# EAGLE board SparkFun_Interactive_Badge_Panel_v10 (EAGLE 6.6.0), part 1 of 11
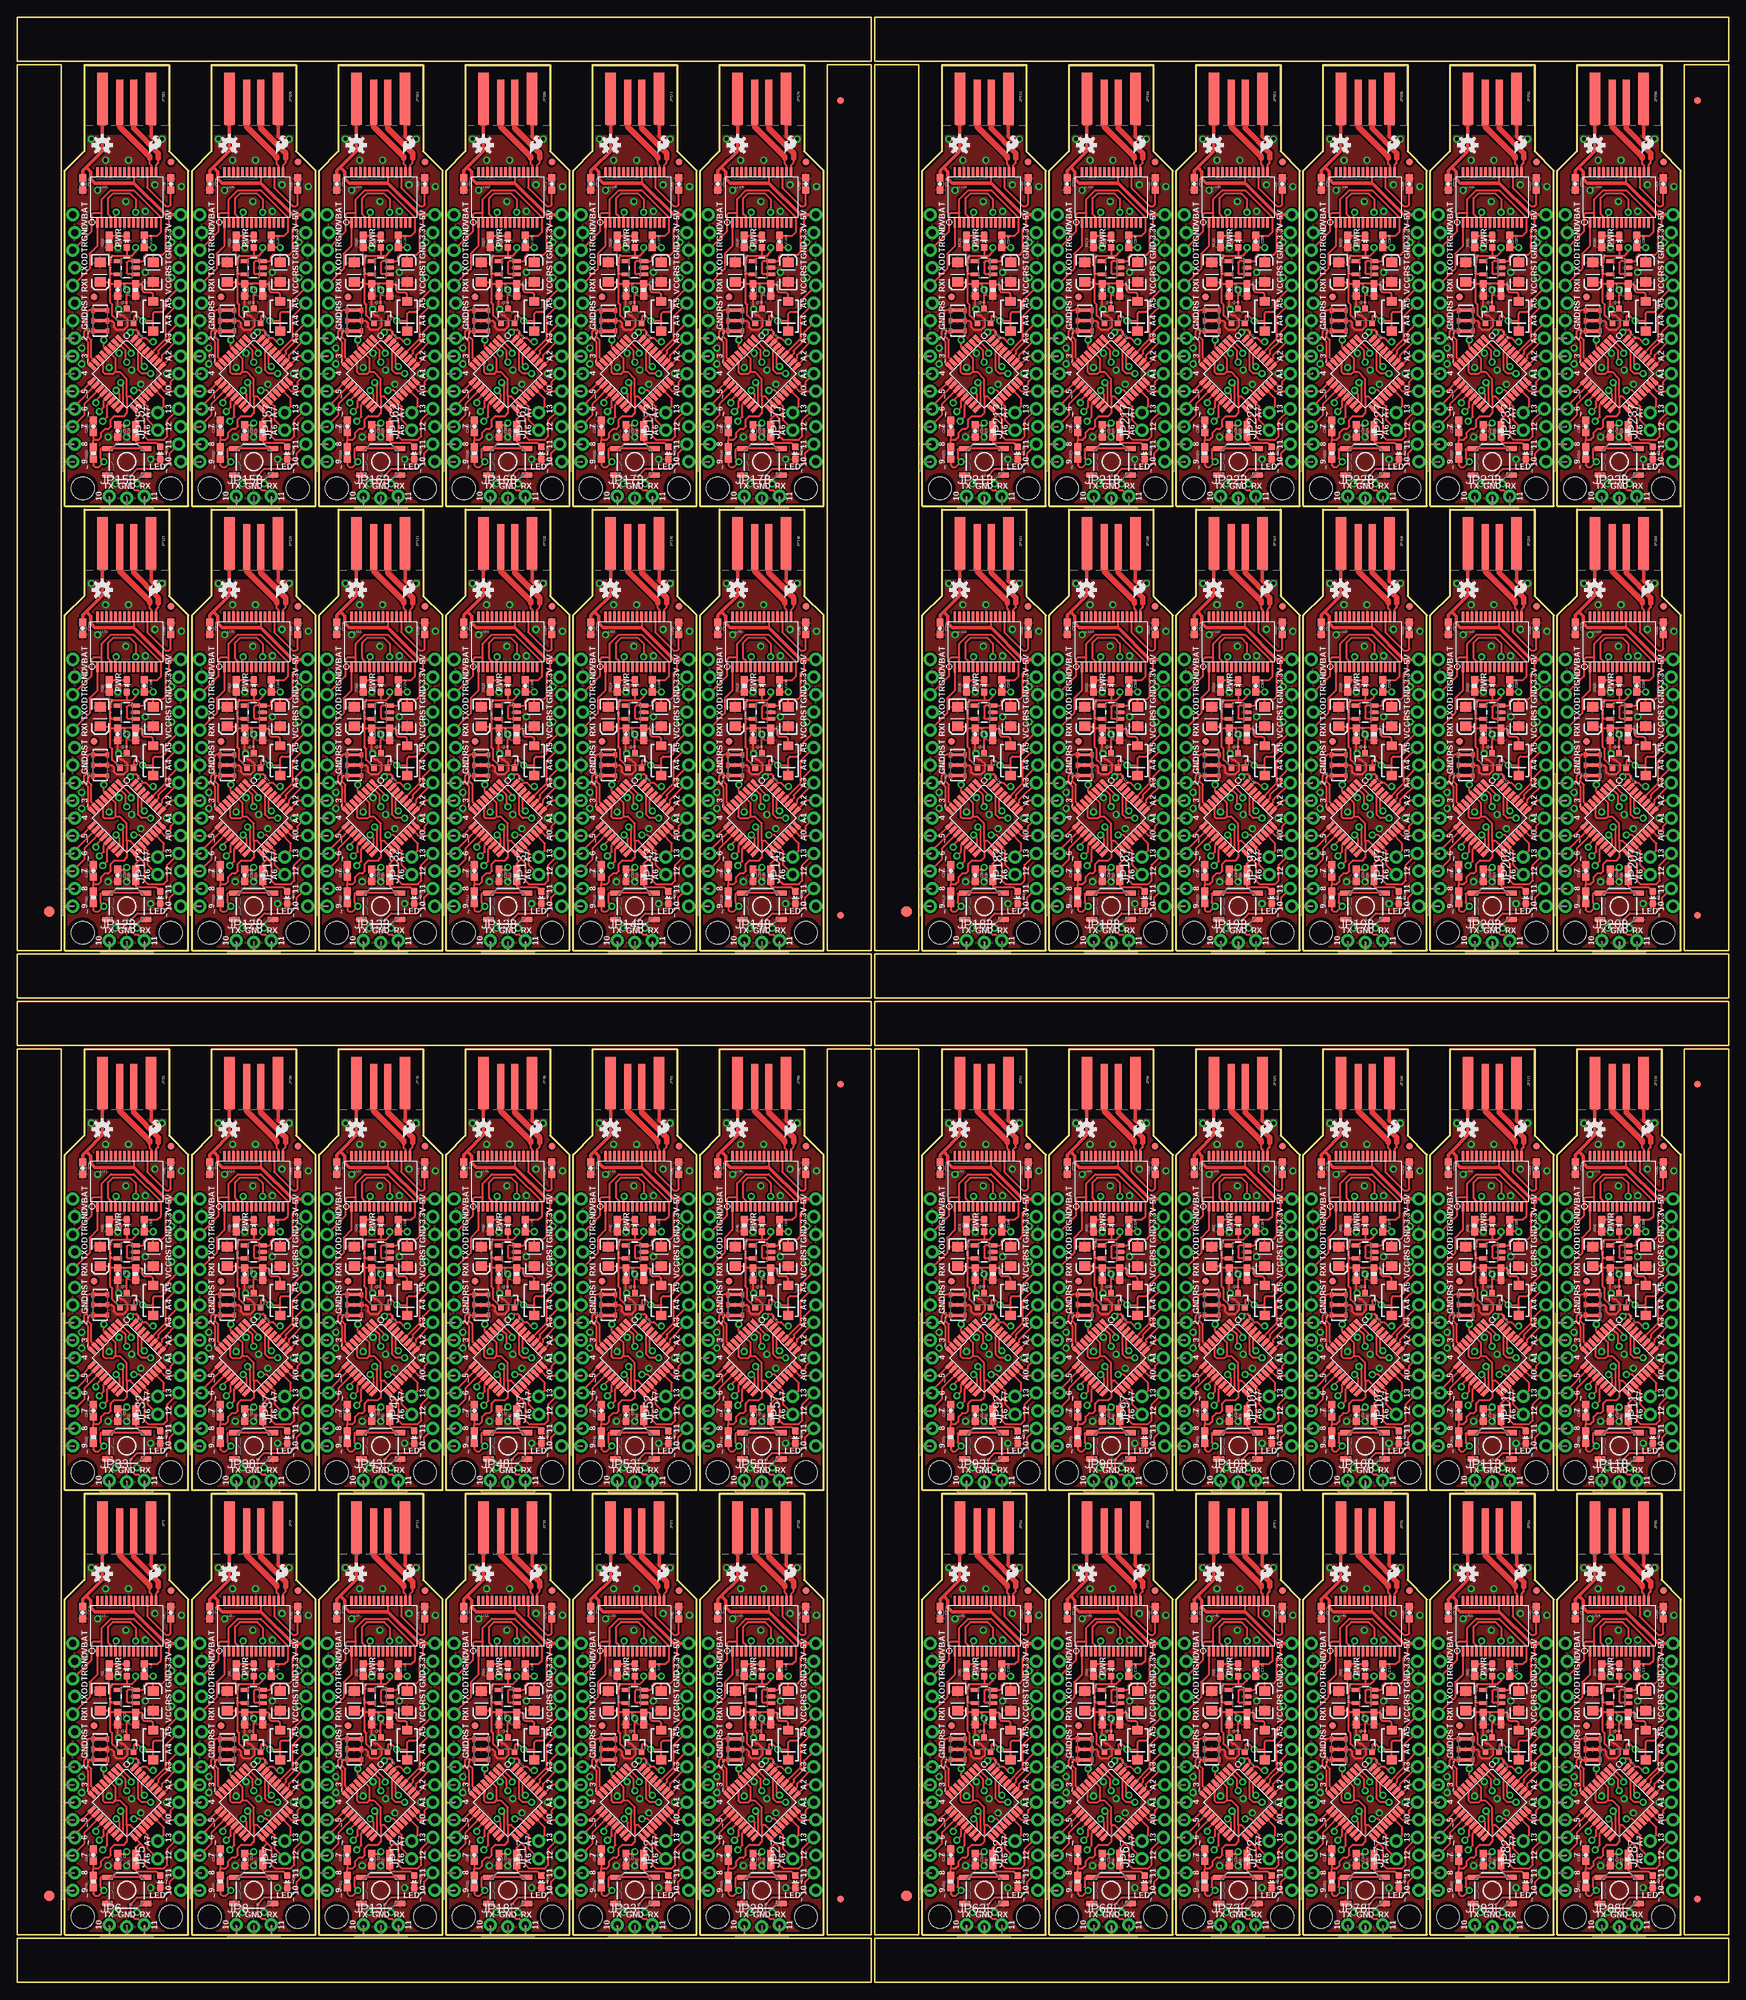
[diagram p0: board, top side]
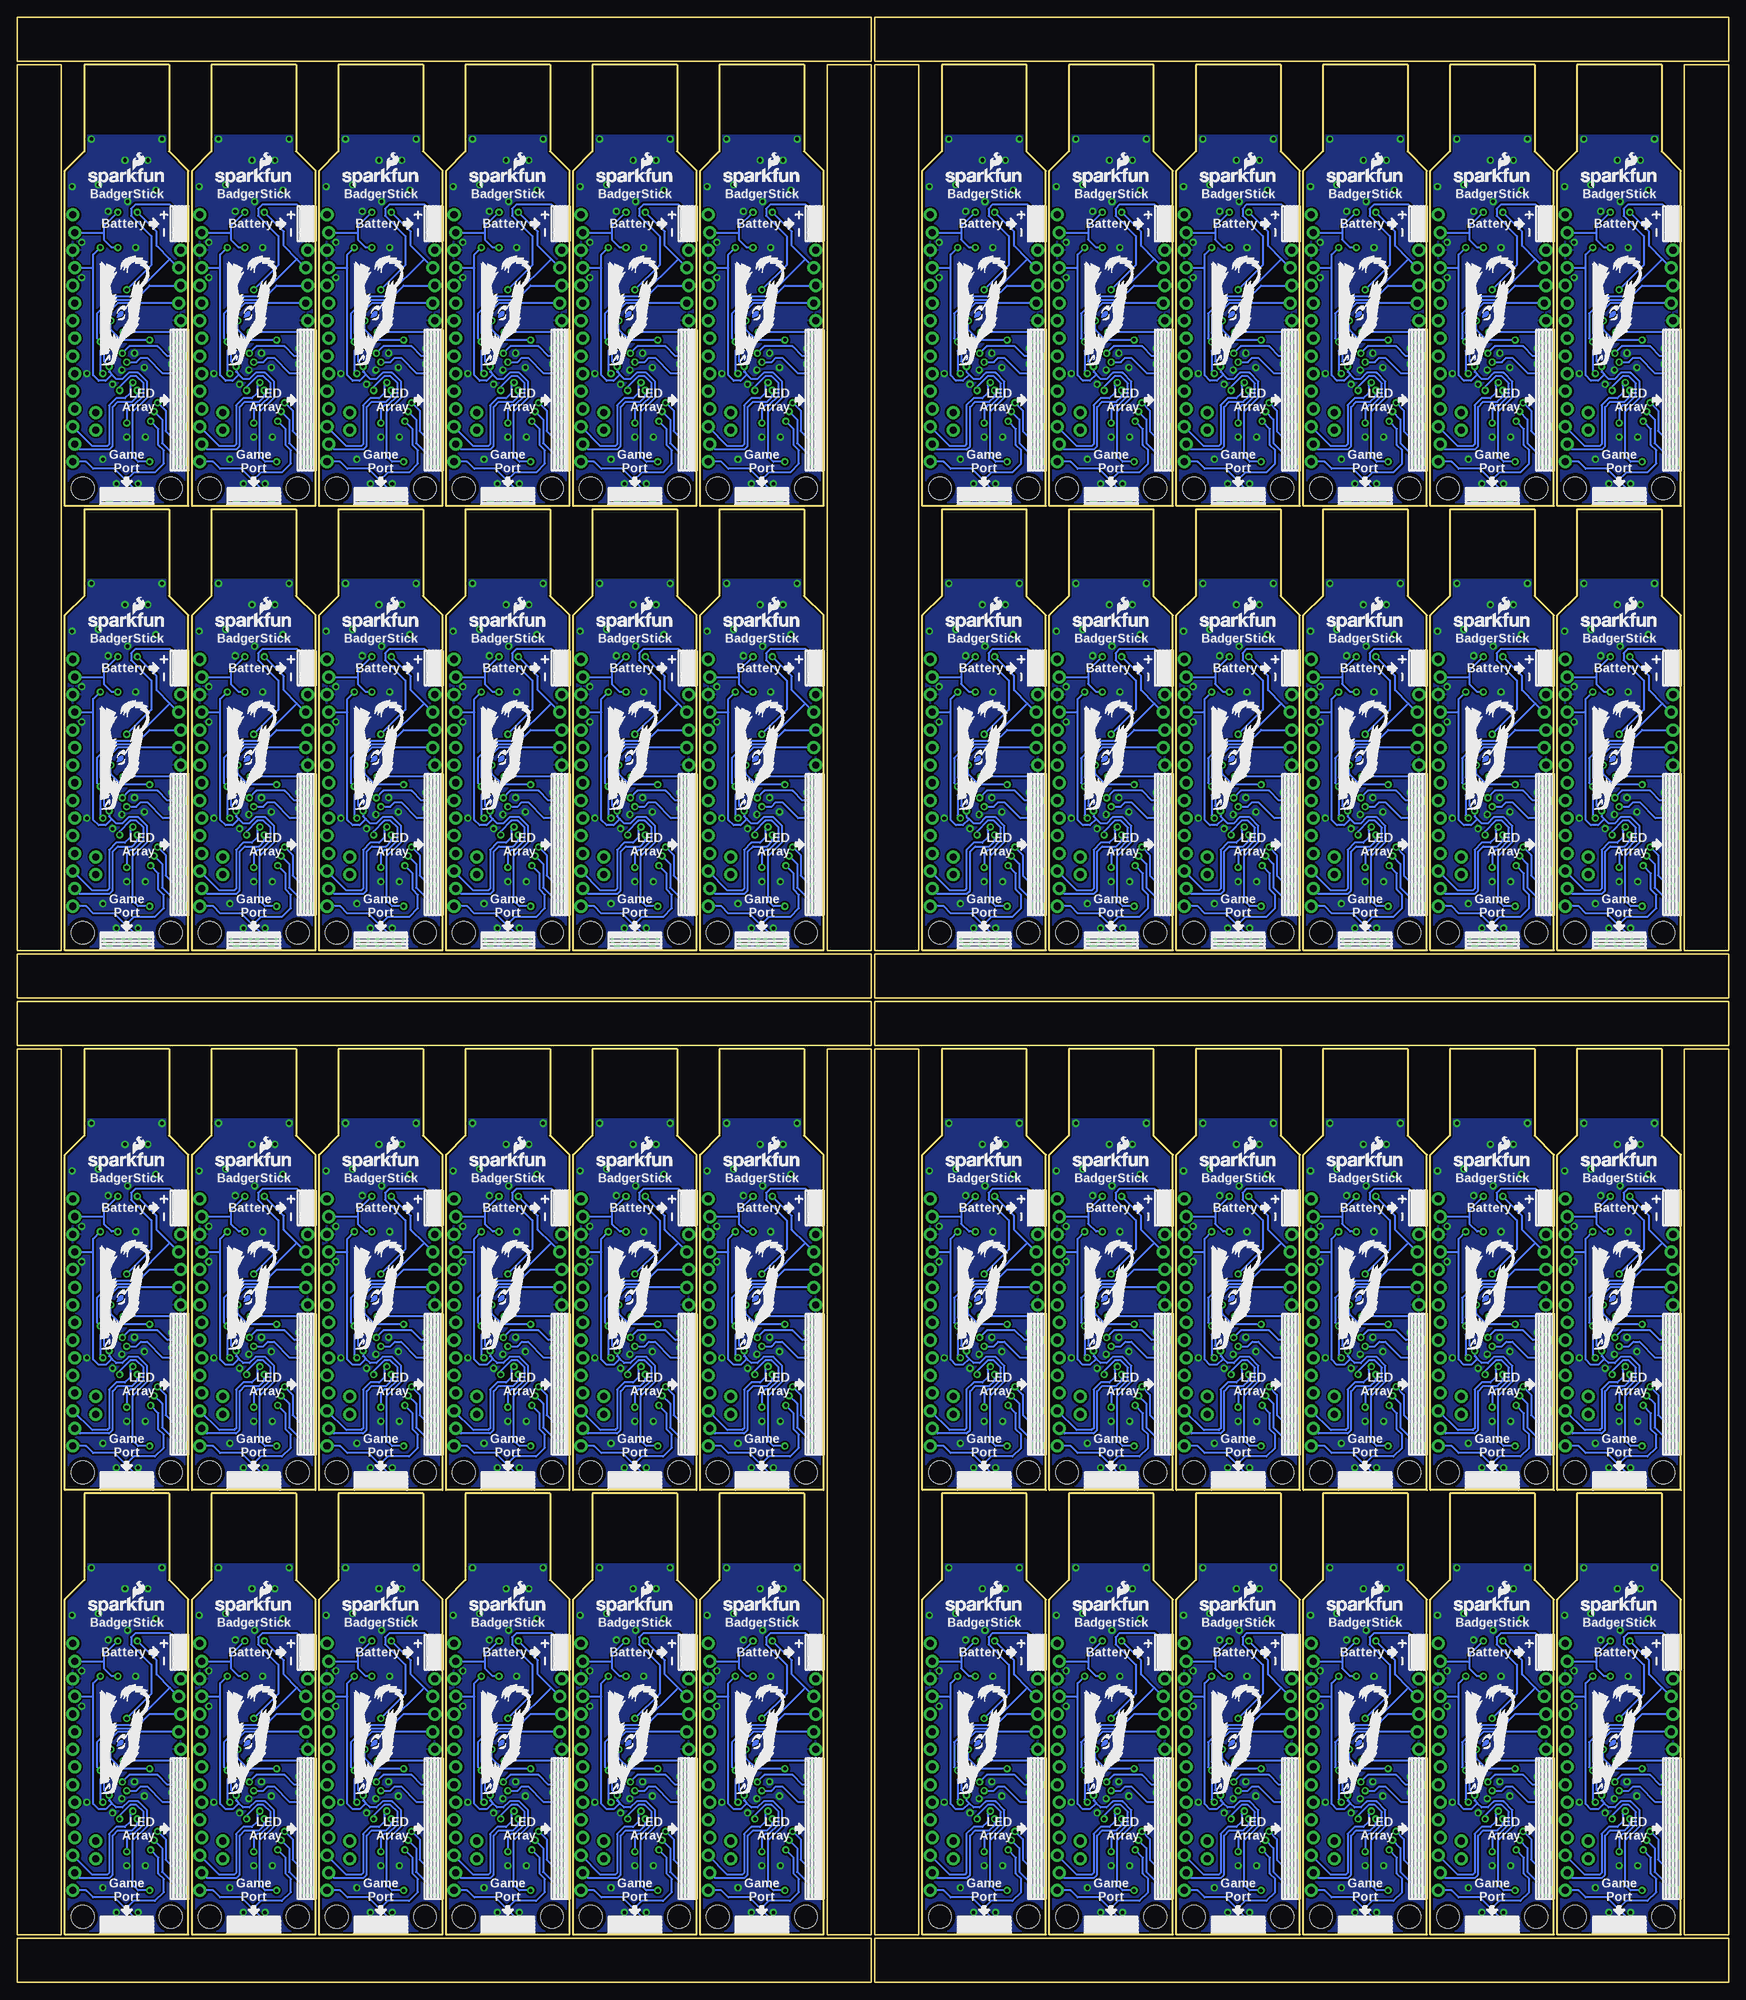
[diagram p1: board, bottom side, seen from below]

Size 246.38 x 282.96 mm. Coordinates in mm from the lower left corner, seen from the top.
Outline: 448 segments
Copper layers (1*16): Top 0.035mm / dielectric 1.5mm / Bottom 0.035mm
Design rules "SparkFun-2-layer": minimum track width 7mil, minimum drill 15mil, track to track 8mil, track to pad 8mil, pad to pad 8mil, via to via 8mil, smd to smd 8mil, copper to edge 8mil, drill to drill 8mil, minimum pad ring 12mil, minimum via ring 10mil, stop-mask expansion 4mil, vias tented up to drill 20mil, thermal gap 10mil
tRestrict: 144 lines

## Footprints (pad centres in the part's own frame; a part is rotated, then mirrored left to right if it is on the bottom)
EIA3216 = smd 1.4 x 1.6: A 1.4,0; C -1.4,0
0603-CAP = smd 1.1 x 1: 1 -0.85,0; 2 0.85,0
SMA-DIODE = smd 1.27 x 1.47: A -2.15,0; C 2.15,0
LED-0603 = smd 1 x 1: A 0,-0.877; C 0,0.877
FIDUCIAL-1.5X3 = smd 1.5 x 1.5: 1 0,0
FIDUCIAL-1X2 = smd 1 x 1: 1 0,0
USB-A-PCB = smd 7.5 x 1.5: 5V -0.2,-3.5; GND -0.2,3.5 | smd 6.5 x 1: USB_M 0.3,-1; USB_P 0.3,1
1X15_LOCK_NO_SILK = drill 1.016 pad 1.88: 1 0,0.127; 2 2.54,-0.127; 3 5.08,0.127; 4 7.62,-0.127; 5 10.16,0.127; 6 12.7,-0.127; 7 15.24,0.127; 8 17.78,-0.127; 9 20.32,0.127; 10 22.86,-0.127; 11 25.4,0.127; 12 27.94,-0.127; 13 30.48,0.127; 14 33.02,-0.127; 15 35.56,0.127
1X02_NO_SILK = drill 1.016 pad 1.88: 1 0,0; 2 2.54,0
1X03_LOCK_NO_SILK = drill 1.016 pad 1.88: 1 0,0.127; 2 2.54,-0.127; 3 5.08,0.127
SOT23-3 = smd 0.8 x 0.9: 1 -0.95,-1; 2 0.95,-1; 3 0,1.1
0603-RES = smd 1.1 x 1: 1 -0.85,0; 2 0.85,0
TACTILE-SWITCH-SMD = smd 1.524 x 0.762: 1 -2.794,1.905; 2 2.794,1.905; 3 -2.794,-1.905; 4 2.794,-1.905
STAND-OFF = hole 3.302: 0,0
SOT23-5 = smd 0.55 x 1.2: 1 -0.95,-1.3; 2 0,-1.3; 3 0.95,-1.3; 4 0.95,1.3; 5 -0.95,1.3
TQFP32-08 = smd 1.27 x 0.559: 1 -4.293,2.8; 2 -4.293,2; 3 -4.293,1.2; 4 -4.293,0.4; 5 -4.293,-0.4; 6 -4.293,-1.2; 7 -4.293,-2; 8 -4.293,-2.8; 17 4.293,-2.8; 18 4.293,-2; 19 4.293,-1.2; 20 4.293,-0.4; 21 4.293,0.4; 22 4.293,1.2; 23 4.293,2; 24 4.293,2.8 | smd 0.559 x 1.27: 9 -2.8,-4.293; 10 -2,-4.293; 11 -1.2,-4.293; 12 -0.4,-4.293; 13 0.4,-4.293; 14 1.2,-4.293; 15 2,-4.293; 16 2.8,-4.293; 25 2.8,4.293; 26 2,4.293; 27 1.2,4.293; 28 0.4,4.293; 29 -0.4,4.293; 30 -1.2,4.293; 31 -2,4.293; 32 -2.8,4.293
SSOP28DB = smd 0.348 x 1.397: 1 -4.225,-3.656; 2 -3.575,-3.656; 3 -2.925,-3.656; 4 -2.275,-3.656; 5 -1.625,-3.656; 6 -0.975,-3.656; 7 -0.325,-3.656; 8 0.325,-3.656; 9 0.975,-3.656; 10 1.625,-3.656; 11 2.275,-3.656; 12 2.925,-3.656; 13 3.575,-3.656; 14 4.225,-3.656; 15 4.225,3.656; 16 3.575,3.656; 17 2.925,3.656; 18 2.275,3.656; 19 1.625,3.656; 20 0.975,3.656; 21 0.325,3.656; 22 -0.325,3.656; 23 -0.975,3.656; 24 -1.625,3.656; 25 -2.275,3.656; 26 -2.925,3.656; 27 -3.575,3.656; 28 -4.225,3.656
RESONATOR-SMD_MED = smd 0.4 x 1.6: 1 -1.5,0; 2 0,0; 3 1.5,0

## Placement (x,y rotation side)
C1  10uF  [EIA3216]  19.56,40.51 90 top
C2  10uF  [EIA3216]  11.94,40.51 270 top
C3  0.1uF  [0603-CAP]  14.48,37.97 270 top
C4  0.1uF  [0603-CAP]  18.29,44.96 270 top
C5  0.1uF  [0603-CAP]  14.48,17.65 270 top
C6  0.1uF  [0603-CAP]  10.92,18.29 90 top
C7  0.1uF  [0603-CAP]  9.4,53.21 270 top
C8  0.1uF  [0603-CAP]  22.1,53.21 90 top
C9  10uF  [EIA3216]  37.85,40.51 90 top
C10  10uF  [EIA3216]  30.23,40.51 270 top
C11  0.1uF  [0603-CAP]  32.77,37.97 270 top
C12  0.1uF  [0603-CAP]  36.58,44.96 270 top
C13  0.1uF  [0603-CAP]  32.77,17.65 270 top
C14  0.1uF  [0603-CAP]  29.21,18.29 90 top
C15  0.1uF  [0603-CAP]  27.69,53.21 270 top
C16  0.1uF  [0603-CAP]  40.39,53.21 90 top
C17  10uF  [EIA3216]  56.13,40.51 90 top
C18  10uF  [EIA3216]  48.51,40.51 270 top
C19  0.1uF  [0603-CAP]  51.05,37.97 270 top
C20  0.1uF  [0603-CAP]  54.86,44.96 270 top
C21  0.1uF  [0603-CAP]  51.05,17.65 270 top
C22  0.1uF  [0603-CAP]  47.5,18.29 90 top
C23  0.1uF  [0603-CAP]  45.97,53.21 270 top
C24  0.1uF  [0603-CAP]  58.67,53.21 90 top
C25  10uF  [EIA3216]  74.42,40.51 90 top
C26  10uF  [EIA3216]  66.8,40.51 270 top
C27  0.1uF  [0603-CAP]  69.34,37.97 270 top
C28  0.1uF  [0603-CAP]  73.15,44.96 270 top
C29  0.1uF  [0603-CAP]  69.34,17.65 270 top
C30  0.1uF  [0603-CAP]  65.79,18.29 90 top
C31  0.1uF  [0603-CAP]  64.26,53.21 270 top
C32  0.1uF  [0603-CAP]  76.96,53.21 90 top
C33  10uF  [EIA3216]  92.71,40.51 90 top
C34  10uF  [EIA3216]  85.09,40.51 270 top
C35  0.1uF  [0603-CAP]  87.63,37.97 270 top
C36  0.1uF  [0603-CAP]  91.44,44.96 270 top
C37  0.1uF  [0603-CAP]  87.63,17.65 270 top
C38  0.1uF  [0603-CAP]  84.07,18.29 90 top
C39  0.1uF  [0603-CAP]  82.55,53.21 270 top
C40  0.1uF  [0603-CAP]  95.25,53.21 90 top
C41  10uF  [EIA3216]  111,40.51 90 top
C42  10uF  [EIA3216]  103.38,40.51 270 top
C43  0.1uF  [0603-CAP]  105.92,37.97 270 top
C44  0.1uF  [0603-CAP]  109.73,44.96 270 top
C45  0.1uF  [0603-CAP]  105.92,17.65 270 top
C46  0.1uF  [0603-CAP]  102.36,18.29 90 top
C47  0.1uF  [0603-CAP]  100.84,53.21 270 top
C48  0.1uF  [0603-CAP]  113.54,53.21 90 top
C49  10uF  [EIA3216]  19.56,104.52 90 top
C50  10uF  [EIA3216]  11.94,104.52 270 top
C51  0.1uF  [0603-CAP]  14.48,101.98 270 top
C52  0.1uF  [0603-CAP]  18.29,108.97 270 top
C53  0.1uF  [0603-CAP]  14.48,81.66 270 top
C54  0.1uF  [0603-CAP]  10.92,82.3 90 top
C55  0.1uF  [0603-CAP]  9.4,117.22 270 top
C56  0.1uF  [0603-CAP]  22.1,117.22 90 top
C57  10uF  [EIA3216]  37.85,104.52 90 top
C58  10uF  [EIA3216]  30.23,104.52 270 top
C59  0.1uF  [0603-CAP]  32.77,101.98 270 top
C60  0.1uF  [0603-CAP]  36.58,108.97 270 top
C61  0.1uF  [0603-CAP]  32.77,81.66 270 top
C62  0.1uF  [0603-CAP]  29.21,82.3 90 top
C63  0.1uF  [0603-CAP]  27.69,117.22 270 top
C64  0.1uF  [0603-CAP]  40.39,117.22 90 top
C65  10uF  [EIA3216]  56.13,104.52 90 top
C66  10uF  [EIA3216]  48.51,104.52 270 top
C67  0.1uF  [0603-CAP]  51.05,101.98 270 top
C68  0.1uF  [0603-CAP]  54.86,108.97 270 top
C69  0.1uF  [0603-CAP]  51.05,81.66 270 top
C70  0.1uF  [0603-CAP]  47.5,82.3 90 top
C71  0.1uF  [0603-CAP]  45.97,117.22 270 top
C72  0.1uF  [0603-CAP]  58.67,117.22 90 top
C73  10uF  [EIA3216]  74.42,104.52 90 top
C74  10uF  [EIA3216]  66.8,104.52 270 top
C75  0.1uF  [0603-CAP]  69.34,101.98 270 top
C76  0.1uF  [0603-CAP]  73.15,108.97 270 top
C77  0.1uF  [0603-CAP]  69.34,81.66 270 top
C78  0.1uF  [0603-CAP]  65.79,82.3 90 top
C79  0.1uF  [0603-CAP]  64.26,117.22 270 top
C80  0.1uF  [0603-CAP]  76.96,117.22 90 top
C81  10uF  [EIA3216]  92.71,104.52 90 top
C82  10uF  [EIA3216]  85.09,104.52 270 top
C83  0.1uF  [0603-CAP]  87.63,101.98 270 top
C84  0.1uF  [0603-CAP]  91.44,108.97 270 top
C85  0.1uF  [0603-CAP]  87.63,81.66 270 top
C86  0.1uF  [0603-CAP]  84.07,82.3 90 top
C87  0.1uF  [0603-CAP]  82.55,117.22 270 top
C88  0.1uF  [0603-CAP]  95.25,117.22 90 top
C89  10uF  [EIA3216]  111,104.52 90 top
C90  10uF  [EIA3216]  103.38,104.52 270 top
C91  0.1uF  [0603-CAP]  105.92,101.98 270 top
C92  0.1uF  [0603-CAP]  109.73,108.97 270 top
C93  0.1uF  [0603-CAP]  105.92,81.66 270 top
C94  0.1uF  [0603-CAP]  102.36,82.3 90 top
C95  0.1uF  [0603-CAP]  100.84,117.22 270 top
C96  0.1uF  [0603-CAP]  113.54,117.22 90 top
C97  10uF  [EIA3216]  143,40.51 90 top
C98  10uF  [EIA3216]  135.38,40.51 270 top
C99  0.1uF  [0603-CAP]  137.92,37.97 270 top
C100  0.1uF  [0603-CAP]  141.73,44.96 270 top
C101  0.1uF  [0603-CAP]  137.92,17.65 270 top
C102  0.1uF  [0603-CAP]  134.37,18.29 90 top
C103  0.1uF  [0603-CAP]  132.84,53.21 270 top
C104  0.1uF  [0603-CAP]  145.54,53.21 90 top
C105  10uF  [EIA3216]  161.29,40.51 90 top
C106  10uF  [EIA3216]  153.67,40.51 270 top
C107  0.1uF  [0603-CAP]  156.21,37.97 270 top
C108  0.1uF  [0603-CAP]  160.02,44.96 270 top
C109  0.1uF  [0603-CAP]  156.21,17.65 270 top
C110  0.1uF  [0603-CAP]  152.65,18.29 90 top
C111  0.1uF  [0603-CAP]  151.13,53.21 270 top
C112  0.1uF  [0603-CAP]  163.83,53.21 90 top
C113  10uF  [EIA3216]  179.58,40.51 90 top
C114  10uF  [EIA3216]  171.96,40.51 270 top
C115  0.1uF  [0603-CAP]  174.5,37.97 270 top
C116  0.1uF  [0603-CAP]  178.31,44.96 270 top
C117  0.1uF  [0603-CAP]  174.5,17.65 270 top
C118  0.1uF  [0603-CAP]  170.94,18.29 90 top
C119  0.1uF  [0603-CAP]  169.42,53.21 270 top
C120  0.1uF  [0603-CAP]  182.12,53.21 90 top
C121  10uF  [EIA3216]  197.87,40.51 90 top
C122  10uF  [EIA3216]  190.25,40.51 270 top
C123  0.1uF  [0603-CAP]  192.79,37.97 270 top
C124  0.1uF  [0603-CAP]  196.6,44.96 270 top
C125  0.1uF  [0603-CAP]  192.79,17.65 270 top
C126  0.1uF  [0603-CAP]  189.23,18.29 90 top
C127  0.1uF  [0603-CAP]  187.71,53.21 270 top
C128  0.1uF  [0603-CAP]  200.41,53.21 90 top
C129  10uF  [EIA3216]  216.15,40.51 90 top
C130  10uF  [EIA3216]  208.53,40.51 270 top
C131  0.1uF  [0603-CAP]  211.07,37.97 270 top
C132  0.1uF  [0603-CAP]  214.88,44.96 270 top
C133  0.1uF  [0603-CAP]  211.07,17.65 270 top
C134  0.1uF  [0603-CAP]  207.52,18.29 90 top
C135  0.1uF  [0603-CAP]  205.99,53.21 270 top
C136  0.1uF  [0603-CAP]  218.69,53.21 90 top
C137  10uF  [EIA3216]  234.44,40.51 90 top
C138  10uF  [EIA3216]  226.82,40.51 270 top
C139  0.1uF  [0603-CAP]  229.36,37.97 270 top
C140  0.1uF  [0603-CAP]  233.17,44.96 270 top
C141  0.1uF  [0603-CAP]  229.36,17.65 270 top
C142  0.1uF  [0603-CAP]  225.81,18.29 90 top
C143  0.1uF  [0603-CAP]  224.28,53.21 270 top
C144  0.1uF  [0603-CAP]  236.98,53.21 90 top
C145  10uF  [EIA3216]  143,104.52 90 top
C146  10uF  [EIA3216]  135.38,104.52 270 top
C147  0.1uF  [0603-CAP]  137.92,101.98 270 top
C148  0.1uF  [0603-CAP]  141.73,108.97 270 top
C149  0.1uF  [0603-CAP]  137.92,81.66 270 top
C150  0.1uF  [0603-CAP]  134.37,82.3 90 top
C151  0.1uF  [0603-CAP]  132.84,117.22 270 top
C152  0.1uF  [0603-CAP]  145.54,117.22 90 top
C153  10uF  [EIA3216]  161.29,104.52 90 top
C154  10uF  [EIA3216]  153.67,104.52 270 top
C155  0.1uF  [0603-CAP]  156.21,101.98 270 top
C156  0.1uF  [0603-CAP]  160.02,108.97 270 top
C157  0.1uF  [0603-CAP]  156.21,81.66 270 top
C158  0.1uF  [0603-CAP]  152.65,82.3 90 top
C159  0.1uF  [0603-CAP]  151.13,117.22 270 top
C160  0.1uF  [0603-CAP]  163.83,117.22 90 top
C161  10uF  [EIA3216]  179.58,104.52 90 top
C162  10uF  [EIA3216]  171.96,104.52 270 top
C163  0.1uF  [0603-CAP]  174.5,101.98 270 top
C164  0.1uF  [0603-CAP]  178.31,108.97 270 top
C165  0.1uF  [0603-CAP]  174.5,81.66 270 top
C166  0.1uF  [0603-CAP]  170.94,82.3 90 top
C167  0.1uF  [0603-CAP]  169.42,117.22 270 top
C168  0.1uF  [0603-CAP]  182.12,117.22 90 top
C169  10uF  [EIA3216]  197.87,104.52 90 top
C170  10uF  [EIA3216]  190.25,104.52 270 top
C171  0.1uF  [0603-CAP]  192.79,101.98 270 top
C172  0.1uF  [0603-CAP]  196.6,108.97 270 top
C173  0.1uF  [0603-CAP]  192.79,81.66 270 top
C174  0.1uF  [0603-CAP]  189.23,82.3 90 top
C175  0.1uF  [0603-CAP]  187.71,117.22 270 top
C176  0.1uF  [0603-CAP]  200.41,117.22 90 top
C177  10uF  [EIA3216]  216.15,104.52 90 top
C178  10uF  [EIA3216]  208.53,104.52 270 top
C179  0.1uF  [0603-CAP]  211.07,101.98 270 top
C180  0.1uF  [0603-CAP]  214.88,108.97 270 top
C181  0.1uF  [0603-CAP]  211.07,81.66 270 top
C182  0.1uF  [0603-CAP]  207.52,82.3 90 top
C183  0.1uF  [0603-CAP]  205.99,117.22 270 top
C184  0.1uF  [0603-CAP]  218.69,117.22 90 top
C185  10uF  [EIA3216]  234.44,104.52 90 top
C186  10uF  [EIA3216]  226.82,104.52 270 top
C187  0.1uF  [0603-CAP]  229.36,101.98 270 top
C188  0.1uF  [0603-CAP]  233.17,108.97 270 top
C189  0.1uF  [0603-CAP]  229.36,81.66 270 top
C190  0.1uF  [0603-CAP]  225.81,82.3 90 top
C191  0.1uF  [0603-CAP]  224.28,117.22 270 top
C192  0.1uF  [0603-CAP]  236.98,117.22 90 top
C193  10uF  [EIA3216]  19.56,182.25 90 top
C194  10uF  [EIA3216]  11.94,182.25 270 top
C195  0.1uF  [0603-CAP]  14.48,179.71 270 top
C196  0.1uF  [0603-CAP]  18.29,186.69 270 top
C197  0.1uF  [0603-CAP]  14.48,159.38 270 top
C198  0.1uF  [0603-CAP]  10.92,160.02 90 top
C199  0.1uF  [0603-CAP]  9.4,194.94 270 top
C200  0.1uF  [0603-CAP]  22.1,194.94 90 top
C201  10uF  [EIA3216]  37.85,182.25 90 top
C202  10uF  [EIA3216]  30.23,182.25 270 top
C203  0.1uF  [0603-CAP]  32.77,179.71 270 top
C204  0.1uF  [0603-CAP]  36.58,186.69 270 top
C205  0.1uF  [0603-CAP]  32.77,159.38 270 top
C206  0.1uF  [0603-CAP]  29.21,160.02 90 top
C207  0.1uF  [0603-CAP]  27.69,194.94 270 top
C208  0.1uF  [0603-CAP]  40.39,194.94 90 top
C209  10uF  [EIA3216]  56.13,182.25 90 top
C210  10uF  [EIA3216]  48.51,182.25 270 top
C211  0.1uF  [0603-CAP]  51.05,179.71 270 top
C212  0.1uF  [0603-CAP]  54.86,186.69 270 top
C213  0.1uF  [0603-CAP]  51.05,159.38 270 top
C214  0.1uF  [0603-CAP]  47.5,160.02 90 top
C215  0.1uF  [0603-CAP]  45.97,194.94 270 top
C216  0.1uF  [0603-CAP]  58.67,194.94 90 top
C217  10uF  [EIA3216]  74.42,182.25 90 top
C218  10uF  [EIA3216]  66.8,182.25 270 top
C219  0.1uF  [0603-CAP]  69.34,179.71 270 top
C220  0.1uF  [0603-CAP]  73.15,186.69 270 top
C221  0.1uF  [0603-CAP]  69.34,159.38 270 top
C222  0.1uF  [0603-CAP]  65.79,160.02 90 top
C223  0.1uF  [0603-CAP]  64.26,194.94 270 top
C224  0.1uF  [0603-CAP]  76.96,194.94 90 top
C225  10uF  [EIA3216]  92.71,182.25 90 top
C226  10uF  [EIA3216]  85.09,182.25 270 top
C227  0.1uF  [0603-CAP]  87.63,179.71 270 top
C228  0.1uF  [0603-CAP]  91.44,186.69 270 top
C229  0.1uF  [0603-CAP]  87.63,159.38 270 top
C230  0.1uF  [0603-CAP]  84.07,160.02 90 top
C231  0.1uF  [0603-CAP]  82.55,194.94 270 top
C232  0.1uF  [0603-CAP]  95.25,194.94 90 top
C233  10uF  [EIA3216]  111,182.25 90 top
C234  10uF  [EIA3216]  103.38,182.25 270 top
C235  0.1uF  [0603-CAP]  105.92,179.71 270 top
C236  0.1uF  [0603-CAP]  109.73,186.69 270 top
C237  0.1uF  [0603-CAP]  105.92,159.38 270 top
C238  0.1uF  [0603-CAP]  102.36,160.02 90 top
C239  0.1uF  [0603-CAP]  100.84,194.94 270 top
C240  0.1uF  [0603-CAP]  113.54,194.94 90 top
C241  10uF  [EIA3216]  19.56,246.25 90 top
C242  10uF  [EIA3216]  11.94,246.25 270 top
C243  0.1uF  [0603-CAP]  14.48,243.71 270 top
C244  0.1uF  [0603-CAP]  18.29,250.7 270 top
C245  0.1uF  [0603-CAP]  14.48,223.39 270 top
C246  0.1uF  [0603-CAP]  10.92,224.03 90 top
C247  0.1uF  [0603-CAP]  9.4,258.95 270 top
C248  0.1uF  [0603-CAP]  22.1,258.95 90 top
C249  10uF  [EIA3216]  37.85,246.25 90 top
C250  10uF  [EIA3216]  30.23,246.25 270 top
C251  0.1uF  [0603-CAP]  32.77,243.71 270 top
C252  0.1uF  [0603-CAP]  36.58,250.7 270 top
C253  0.1uF  [0603-CAP]  32.77,223.39 270 top
C254  0.1uF  [0603-CAP]  29.21,224.03 90 top
C255  0.1uF  [0603-CAP]  27.69,258.95 270 top
C256  0.1uF  [0603-CAP]  40.39,258.95 90 top
C257  10uF  [EIA3216]  56.13,246.25 90 top
C258  10uF  [EIA3216]  48.51,246.25 270 top
C259  0.1uF  [0603-CAP]  51.05,243.71 270 top
C260  0.1uF  [0603-CAP]  54.86,250.7 270 top
C261  0.1uF  [0603-CAP]  51.05,223.39 270 top
C262  0.1uF  [0603-CAP]  47.5,224.03 90 top
C263  0.1uF  [0603-CAP]  45.97,258.95 270 top
C264  0.1uF  [0603-CAP]  58.67,258.95 90 top
C265  10uF  [EIA3216]  74.42,246.25 90 top
C266  10uF  [EIA3216]  66.8,246.25 270 top
C267  0.1uF  [0603-CAP]  69.34,243.71 270 top
C268  0.1uF  [0603-CAP]  73.15,250.7 270 top
C269  0.1uF  [0603-CAP]  69.34,223.39 270 top
C270  0.1uF  [0603-CAP]  65.79,224.03 90 top
C271  0.1uF  [0603-CAP]  64.26,258.95 270 top
C272  0.1uF  [0603-CAP]  76.96,258.95 90 top
C273  10uF  [EIA3216]  92.71,246.25 90 top
C274  10uF  [EIA3216]  85.09,246.25 270 top
C275  0.1uF  [0603-CAP]  87.63,243.71 270 top
C276  0.1uF  [0603-CAP]  91.44,250.7 270 top
C277  0.1uF  [0603-CAP]  87.63,223.39 270 top
C278  0.1uF  [0603-CAP]  84.07,224.03 90 top
C279  0.1uF  [0603-CAP]  82.55,258.95 270 top
C280  0.1uF  [0603-CAP]  95.25,258.95 90 top
C281  10uF  [EIA3216]  111,246.25 90 top
C282  10uF  [EIA3216]  103.38,246.25 270 top
C283  0.1uF  [0603-CAP]  105.92,243.71 270 top
C284  0.1uF  [0603-CAP]  109.73,250.7 270 top
C285  0.1uF  [0603-CAP]  105.92,223.39 270 top
C286  0.1uF  [0603-CAP]  102.36,224.03 90 top
C287  0.1uF  [0603-CAP]  100.84,258.95 270 top
C288  0.1uF  [0603-CAP]  113.54,258.95 90 top
C289  10uF  [EIA3216]  143,182.25 90 top
C290  10uF  [EIA3216]  135.38,182.25 270 top
C291  0.1uF  [0603-CAP]  137.92,179.71 270 top
C292  0.1uF  [0603-CAP]  141.73,186.69 270 top
C293  0.1uF  [0603-CAP]  137.92,159.38 270 top
C294  0.1uF  [0603-CAP]  134.37,160.02 90 top
C295  0.1uF  [0603-CAP]  132.84,194.94 270 top
C296  0.1uF  [0603-CAP]  145.54,194.94 90 top
C297  10uF  [EIA3216]  161.29,182.25 90 top
C298  10uF  [EIA3216]  153.67,182.25 270 top
C299  0.1uF  [0603-CAP]  156.21,179.71 270 top
C300  0.1uF  [0603-CAP]  160.02,186.69 270 top
C301  0.1uF  [0603-CAP]  156.21,159.38 270 top
C302  0.1uF  [0603-CAP]  152.65,160.02 90 top
C303  0.1uF  [0603-CAP]  151.13,194.94 270 top
C304  0.1uF  [0603-CAP]  163.83,194.94 90 top
C305  10uF  [EIA3216]  179.58,182.25 90 top
C306  10uF  [EIA3216]  171.96,182.25 270 top
C307  0.1uF  [0603-CAP]  174.5,179.71 270 top
C308  0.1uF  [0603-CAP]  178.31,186.69 270 top
C309  0.1uF  [0603-CAP]  174.5,159.38 270 top
C310  0.1uF  [0603-CAP]  170.94,160.02 90 top
C311  0.1uF  [0603-CAP]  169.42,194.94 270 top
C312  0.1uF  [0603-CAP]  182.12,194.94 90 top
C313  10uF  [EIA3216]  197.87,182.25 90 top
C314  10uF  [EIA3216]  190.25,182.25 270 top
C315  0.1uF  [0603-CAP]  192.79,179.71 270 top
C316  0.1uF  [0603-CAP]  196.6,186.69 270 top
C317  0.1uF  [0603-CAP]  192.79,159.38 270 top
C318  0.1uF  [0603-CAP]  189.23,160.02 90 top
C319  0.1uF  [0603-CAP]  187.71,194.94 270 top
C320  0.1uF  [0603-CAP]  200.41,194.94 90 top
C321  10uF  [EIA3216]  216.15,182.25 90 top
C322  10uF  [EIA3216]  208.53,182.25 270 top
C323  0.1uF  [0603-CAP]  211.07,179.71 270 top
C324  0.1uF  [0603-CAP]  214.88,186.69 270 top
C325  0.1uF  [0603-CAP]  211.07,159.38 270 top
C326  0.1uF  [0603-CAP]  207.52,160.02 90 top
C327  0.1uF  [0603-CAP]  205.99,194.94 270 top
C328  0.1uF  [0603-CAP]  218.69,194.94 90 top
C329  10uF  [EIA3216]  234.44,182.25 90 top
C330  10uF  [EIA3216]  226.82,182.25 270 top
C331  0.1uF  [0603-CAP]  229.36,179.71 270 top
C332  0.1uF  [0603-CAP]  233.17,186.69 270 top
C333  0.1uF  [0603-CAP]  229.36,159.38 270 top
C334  0.1uF  [0603-CAP]  225.81,160.02 90 top
C335  0.1uF  [0603-CAP]  224.28,194.94 270 top
C336  0.1uF  [0603-CAP]  236.98,194.94 90 top
C337  10uF  [EIA3216]  143,246.25 90 top
C338  10uF  [EIA3216]  135.38,246.25 270 top
C339  0.1uF  [0603-CAP]  137.92,243.71 270 top
C340  0.1uF  [0603-CAP]  141.73,250.7 270 top
C341  0.1uF  [0603-CAP]  137.92,223.39 270 top
C342  0.1uF  [0603-CAP]  134.37,224.03 90 top
C343  0.1uF  [0603-CAP]  132.84,258.95 270 top
C344  0.1uF  [0603-CAP]  145.54,258.95 90 top
C345  10uF  [EIA3216]  161.29,246.25 90 top
C346  10uF  [EIA3216]  153.67,246.25 270 top
C347  0.1uF  [0603-CAP]  156.21,243.71 270 top
C348  0.1uF  [0603-CAP]  160.02,250.7 270 top
C349  0.1uF  [0603-CAP]  156.21,223.39 270 top
C350  0.1uF  [0603-CAP]  152.65,224.03 90 top
C351  0.1uF  [0603-CAP]  151.13,258.95 270 top
C352  0.1uF  [0603-CAP]  163.83,258.95 90 top
C353  10uF  [EIA3216]  179.58,246.25 90 top
C354  10uF  [EIA3216]  171.96,246.25 270 top
C355  0.1uF  [0603-CAP]  174.5,243.71 270 top
C356  0.1uF  [0603-CAP]  178.31,250.7 270 top
C357  0.1uF  [0603-CAP]  174.5,223.39 270 top
C358  0.1uF  [0603-CAP]  170.94,224.03 90 top
C359  0.1uF  [0603-CAP]  169.42,258.95 270 top
C360  0.1uF  [0603-CAP]  182.12,258.95 90 top
C361  10uF  [EIA3216]  197.87,246.25 90 top
C362  10uF  [EIA3216]  190.25,246.25 270 top
C363  0.1uF  [0603-CAP]  192.79,243.71 270 top
C364  0.1uF  [0603-CAP]  196.6,250.7 270 top
C365  0.1uF  [0603-CAP]  192.79,223.39 270 top
C366  0.1uF  [0603-CAP]  189.23,224.03 90 top
C367  0.1uF  [0603-CAP]  187.71,258.95 270 top
C368  0.1uF  [0603-CAP]  200.41,258.95 90 top
C369  10uF  [EIA3216]  216.15,246.25 90 top
C370  10uF  [EIA3216]  208.53,246.25 270 top
C371  0.1uF  [0603-CAP]  211.07,243.71 270 top
C372  0.1uF  [0603-CAP]  214.88,250.7 270 top
C373  0.1uF  [0603-CAP]  211.07,223.39 270 top
C374  0.1uF  [0603-CAP]  207.52,224.03 90 top
C375  0.1uF  [0603-CAP]  205.99,258.95 270 top
C376  0.1uF  [0603-CAP]  218.69,258.95 90 top
C377  10uF  [EIA3216]  234.44,246.25 90 top
C378  10uF  [EIA3216]  226.82,246.25 270 top
C379  0.1uF  [0603-CAP]  229.36,243.71 270 top
C380  0.1uF  [0603-CAP]  233.17,250.7 270 top
C381  0.1uF  [0603-CAP]  229.36,223.39 270 top
C382  0.1uF  [0603-CAP]  225.81,224.03 90 top
C383  0.1uF  [0603-CAP]  224.28,258.95 270 top
C384  0.1uF  [0603-CAP]  236.98,258.95 90 top
D1  MBRA140  [SMA-DIODE]  19.56,34.16 270 top
D2  RED  [LED-0603]  15.75,44.96 0 top
D3  GREEN  [LED-0603]  20.57,14.48 180 top
D4  MBRA140  [SMA-DIODE]  37.85,34.16 270 top
D5  RED  [LED-0603]  34.04,44.96 0 top
D6  GREEN  [LED-0603]  38.86,14.48 180 top
D7  MBRA140  [SMA-DIODE]  56.13,34.16 270 top
D8  RED  [LED-0603]  52.32,44.96 0 top
D9  GREEN  [LED-0603]  57.15,14.48 180 top
D10  MBRA140  [SMA-DIODE]  74.42,34.16 270 top
D11  RED  [LED-0603]  70.61,44.96 0 top
D12  GREEN  [LED-0603]  75.44,14.48 180 top
D13  MBRA140  [SMA-DIODE]  92.71,34.16 270 top
D14  RED  [LED-0603]  88.9,44.96 0 top
D15  GREEN  [LED-0603]  93.73,14.48 180 top
D16  MBRA140  [SMA-DIODE]  111,34.16 270 top
D17  RED  [LED-0603]  107.19,44.96 0 top
D18  GREEN  [LED-0603]  112.01,14.48 180 top
D19  MBRA140  [SMA-DIODE]  19.56,98.17 270 top
D20  RED  [LED-0603]  15.75,108.97 0 top
D21  GREEN  [LED-0603]  20.57,78.49 180 top
D22  MBRA140  [SMA-DIODE]  37.85,98.17 270 top
D23  RED  [LED-0603]  34.04,108.97 0 top
D24  GREEN  [LED-0603]  38.86,78.49 180 top
D25  MBRA140  [SMA-DIODE]  56.13,98.17 270 top
D26  RED  [LED-0603]  52.32,108.97 0 top
D27  GREEN  [LED-0603]  57.15,78.49 180 top
D28  MBRA140  [SMA-DIODE]  74.42,98.17 270 top
D29  RED  [LED-0603]  70.61,108.97 0 top
D30  GREEN  [LED-0603]  75.44,78.49 180 top
D31  MBRA140  [SMA-DIODE]  92.71,98.17 270 top
D32  RED  [LED-0603]  88.9,108.97 0 top
D33  GREEN  [LED-0603]  93.73,78.49 180 top
D34  MBRA140  [SMA-DIODE]  111,98.17 270 top
D35  RED  [LED-0603]  107.19,108.97 0 top
D36  GREEN  [LED-0603]  112.01,78.49 180 top
D37  MBRA140  [SMA-DIODE]  143,34.16 270 top
D38  RED  [LED-0603]  139.19,44.96 0 top
D39  GREEN  [LED-0603]  144.02,14.48 180 top
D40  MBRA140  [SMA-DIODE]  161.29,34.16 270 top
D41  RED  [LED-0603]  157.48,44.96 0 top
D42  GREEN  [LED-0603]  162.31,14.48 180 top
D43  MBRA140  [SMA-DIODE]  179.58,34.16 270 top
D44  RED  [LED-0603]  175.77,44.96 0 top
D45  GREEN  [LED-0603]  180.59,14.48 180 top
D46  MBRA140  [SMA-DIODE]  197.87,34.16 270 top
D47  RED  [LED-0603]  194.06,44.96 0 top
D48  GREEN  [LED-0603]  198.88,14.48 180 top
D49  MBRA140  [SMA-DIODE]  216.15,34.16 270 top
D50  RED  [LED-0603]  212.34,44.96 0 top
D51  GREEN  [LED-0603]  217.17,14.48 180 top
D52  MBRA140  [SMA-DIODE]  234.44,34.16 270 top
D53  RED  [LED-0603]  230.63,44.96 0 top
D54  GREEN  [LED-0603]  235.46,14.48 180 top
D55  MBRA140  [SMA-DIODE]  143,98.17 270 top
D56  RED  [LED-0603]  139.19,108.97 0 top
D57  GREEN  [LED-0603]  144.02,78.49 180 top
D58  MBRA140  [SMA-DIODE]  161.29,98.17 270 top
D59  RED  [LED-0603]  157.48,108.97 0 top
D60  GREEN  [LED-0603]  162.31,78.49 180 top
D61  MBRA140  [SMA-DIODE]  179.58,98.17 270 top
D62  RED  [LED-0603]  175.77,108.97 0 top
D63  GREEN  [LED-0603]  180.59,78.49 180 top
D64  MBRA140  [SMA-DIODE]  197.87,98.17 270 top
D65  RED  [LED-0603]  194.06,108.97 0 top
D66  GREEN  [LED-0603]  198.88,78.49 180 top
D67  MBRA140  [SMA-DIODE]  216.15,98.17 270 top
D68  RED  [LED-0603]  212.34,108.97 0 top
D69  GREEN  [LED-0603]  217.17,78.49 180 top
D70  MBRA140  [SMA-DIODE]  234.44,98.17 270 top
D71  RED  [LED-0603]  230.63,108.97 0 top
D72  GREEN  [LED-0603]  235.46,78.49 180 top
D73  MBRA140  [SMA-DIODE]  19.56,175.9 270 top
D74  RED  [LED-0603]  15.75,186.69 0 top
D75  GREEN  [LED-0603]  20.57,156.21 180 top
D76  MBRA140  [SMA-DIODE]  37.85,175.9 270 top
D77  RED  [LED-0603]  34.04,186.69 0 top
D78  GREEN  [LED-0603]  38.86,156.21 180 top
D79  MBRA140  [SMA-DIODE]  56.13,175.9 270 top
D80  RED  [LED-0603]  52.32,186.69 0 top
D81  GREEN  [LED-0603]  57.15,156.21 180 top
D82  MBRA140  [SMA-DIODE]  74.42,175.9 270 top
D83  RED  [LED-0603]  70.61,186.69 0 top
D84  GREEN  [LED-0603]  75.44,156.21 180 top
D85  MBRA140  [SMA-DIODE]  92.71,175.9 270 top
D86  RED  [LED-0603]  88.9,186.69 0 top
D87  GREEN  [LED-0603]  93.73,156.21 180 top
D88  MBRA140  [SMA-DIODE]  111,175.9 270 top
D89  RED  [LED-0603]  107.19,186.69 0 top
D90  GREEN  [LED-0603]  112.01,156.21 180 top
D91  MBRA140  [SMA-DIODE]  19.56,239.9 270 top
D92  RED  [LED-0603]  15.75,250.7 0 top
D93  GREEN  [LED-0603]  20.57,220.22 180 top
D94  MBRA140  [SMA-DIODE]  37.85,239.9 270 top
D95  RED  [LED-0603]  34.04,250.7 0 top
D96  GREEN  [LED-0603]  38.86,220.22 180 top
D97  MBRA140  [SMA-DIODE]  56.13,239.9 270 top
D98  RED  [LED-0603]  52.32,250.7 0 top
D99  GREEN  [LED-0603]  57.15,220.22 180 top
D100  MBRA140  [SMA-DIODE]  74.42,239.9 270 top
D101  RED  [LED-0603]  70.61,250.7 0 top
D102  GREEN  [LED-0603]  75.44,220.22 180 top
D103  MBRA140  [SMA-DIODE]  92.71,239.9 270 top
D104  RED  [LED-0603]  88.9,250.7 0 top
D105  GREEN  [LED-0603]  93.73,220.22 180 top
D106  MBRA140  [SMA-DIODE]  111,239.9 270 top
D107  RED  [LED-0603]  107.19,250.7 0 top
D108  GREEN  [LED-0603]  112.01,220.22 180 top
D109  MBRA140  [SMA-DIODE]  143,175.9 270 top
D110  RED  [LED-0603]  139.19,186.69 0 top
D111  GREEN  [LED-0603]  144.02,156.21 180 top
D112  MBRA140  [SMA-DIODE]  161.29,175.9 270 top
D113  RED  [LED-0603]  157.48,186.69 0 top
D114  GREEN  [LED-0603]  162.31,156.21 180 top
D115  MBRA140  [SMA-DIODE]  179.58,175.9 270 top
D116  RED  [LED-0603]  175.77,186.69 0 top
D117  GREEN  [LED-0603]  180.59,156.21 180 top
D118  MBRA140  [SMA-DIODE]  197.87,175.9 270 top
D119  RED  [LED-0603]  194.06,186.69 0 top
D120  GREEN  [LED-0603]  198.88,156.21 180 top
D121  MBRA140  [SMA-DIODE]  216.15,175.9 270 top
D122  RED  [LED-0603]  212.34,186.69 0 top
D123  GREEN  [LED-0603]  217.17,156.21 180 top
D124  MBRA140  [SMA-DIODE]  234.44,175.9 270 top
D125  RED  [LED-0603]  230.63,186.69 0 top
D126  GREEN  [LED-0603]  235.46,156.21 180 top
D127  MBRA140  [SMA-DIODE]  143,239.9 270 top
D128  RED  [LED-0603]  139.19,250.7 0 top
D129  GREEN  [LED-0603]  144.02,220.22 180 top
D130  MBRA140  [SMA-DIODE]  161.29,239.9 270 top
D131  RED  [LED-0603]  157.48,250.7 0 top
D132  GREEN  [LED-0603]  162.31,220.22 180 top
D133  MBRA140  [SMA-DIODE]  179.58,239.9 270 top
D134  RED  [LED-0603]  175.77,250.7 0 top
D135  GREEN  [LED-0603]  180.59,220.22 180 top
D136  MBRA140  [SMA-DIODE]  197.87,239.9 270 top
D137  RED  [LED-0603]  194.06,250.7 0 top
D138  GREEN  [LED-0603]  198.88,220.22 180 top
D139  MBRA140  [SMA-DIODE]  216.15,239.9 270 top
D140  RED  [LED-0603]  212.34,250.7 0 top
D141  GREEN  [LED-0603]  217.17,220.22 180 top
D142  MBRA140  [SMA-DIODE]  234.44,239.9 270 top
D143  RED  [LED-0603]  230.63,250.7 0 top
D144  GREEN  [LED-0603]  235.46,220.22 180 top
E$1  [FIDUCIAL-1.5X3]  4.57,12.45 0 top
E$2  [FIDUCIAL-1X2]  241.94,11.94 0 top
E$3  [FIDUCIAL-1X2]  241.94,129.29 180 top
E$4  [FIDUCIAL-1X2]  118.49,11.94 0 top
E$5  [FIDUCIAL-1X2]  118.49,129.29 180 top
E$6  [FIDUCIAL-1.5X3]  128.02,12.45 0 top
E$7  [FIDUCIAL-1X2]  118.49,153.67 0 top
E$8  [FIDUCIAL-1X2]  118.49,271.02 180 top
E$9  [FIDUCIAL-1.5X3]  4.57,154.18 0 top
E$10  [FIDUCIAL-1X2]  241.94,153.67 0 top
E$11  [FIDUCIAL-1X2]  241.94,271.02 180 top
E$12  [FIDUCIAL-1.5X3]  128.02,154.18 0 top
FID1  FIDUCIAL1X2  [FIDUCIAL-1X2]  11.05,36.96 0 top
FID2  FIDUCIAL1X2  [FIDUCIAL-1X2]  22.1,56.39 0 top
FID3  FIDUCIAL1X2  [FIDUCIAL-1X2]  29.34,36.96 0 top
FID4  FIDUCIAL1X2  [FIDUCIAL-1X2]  40.39,56.39 0 top
FID5  FIDUCIAL1X2  [FIDUCIAL-1X2]  47.62,36.96 0 top
FID6  FIDUCIAL1X2  [FIDUCIAL-1X2]  58.67,56.39 0 top
FID7  FIDUCIAL1X2  [FIDUCIAL-1X2]  65.91,36.96 0 top
FID8  FIDUCIAL1X2  [FIDUCIAL-1X2]  76.96,56.39 0 top
FID9  FIDUCIAL1X2  [FIDUCIAL-1X2]  84.2,36.96 0 top
FID10  FIDUCIAL1X2  [FIDUCIAL-1X2]  95.25,56.39 0 top
FID11  FIDUCIAL1X2  [FIDUCIAL-1X2]  102.49,36.96 0 top
FID12  FIDUCIAL1X2  [FIDUCIAL-1X2]  113.54,56.39 0 top
FID13  FIDUCIAL1X2  [FIDUCIAL-1X2]  11.05,100.97 0 top
FID14  FIDUCIAL1X2  [FIDUCIAL-1X2]  22.1,120.4 0 top
FID15  FIDUCIAL1X2  [FIDUCIAL-1X2]  29.34,100.97 0 top
FID16  FIDUCIAL1X2  [FIDUCIAL-1X2]  40.39,120.4 0 top
FID17  FIDUCIAL1X2  [FIDUCIAL-1X2]  47.62,100.97 0 top
FID18  FIDUCIAL1X2  [FIDUCIAL-1X2]  58.67,120.4 0 top
FID19  FIDUCIAL1X2  [FIDUCIAL-1X2]  65.91,100.97 0 top
FID20  FIDUCIAL1X2  [FIDUCIAL-1X2]  76.96,120.4 0 top
FID21  FIDUCIAL1X2  [FIDUCIAL-1X2]  84.2,100.97 0 top
FID22  FIDUCIAL1X2  [FIDUCIAL-1X2]  95.25,120.4 0 top
FID23  FIDUCIAL1X2  [FIDUCIAL-1X2]  102.49,100.97 0 top
FID24  FIDUCIAL1X2  [FIDUCIAL-1X2]  113.54,120.4 0 top
FID25  FIDUCIAL1X2  [FIDUCIAL-1X2]  134.49,36.96 0 top
FID26  FIDUCIAL1X2  [FIDUCIAL-1X2]  145.54,56.39 0 top
FID27  FIDUCIAL1X2  [FIDUCIAL-1X2]  152.78,36.96 0 top
FID28  FIDUCIAL1X2  [FIDUCIAL-1X2]  163.83,56.39 0 top
FID29  FIDUCIAL1X2  [FIDUCIAL-1X2]  171.07,36.96 0 top
FID30  FIDUCIAL1X2  [FIDUCIAL-1X2]  182.12,56.39 0 top
FID31  FIDUCIAL1X2  [FIDUCIAL-1X2]  189.36,36.96 0 top
FID32  FIDUCIAL1X2  [FIDUCIAL-1X2]  200.41,56.39 0 top
FID33  FIDUCIAL1X2  [FIDUCIAL-1X2]  207.65,36.96 0 top
FID34  FIDUCIAL1X2  [FIDUCIAL-1X2]  218.69,56.39 0 top
FID35  FIDUCIAL1X2  [FIDUCIAL-1X2]  225.93,36.96 0 top
FID36  FIDUCIAL1X2  [FIDUCIAL-1X2]  236.98,56.39 0 top
FID37  FIDUCIAL1X2  [FIDUCIAL-1X2]  134.49,100.97 0 top
FID38  FIDUCIAL1X2  [FIDUCIAL-1X2]  145.54,120.4 0 top
FID39  FIDUCIAL1X2  [FIDUCIAL-1X2]  152.78,100.97 0 top
FID40  FIDUCIAL1X2  [FIDUCIAL-1X2]  163.83,120.4 0 top
FID41  FIDUCIAL1X2  [FIDUCIAL-1X2]  171.07,100.97 0 top
FID42  FIDUCIAL1X2  [FIDUCIAL-1X2]  182.12,120.4 0 top
FID43  FIDUCIAL1X2  [FIDUCIAL-1X2]  189.36,100.97 0 top
FID44  FIDUCIAL1X2  [FIDUCIAL-1X2]  200.41,120.4 0 top
FID45  FIDUCIAL1X2  [FIDUCIAL-1X2]  207.65,100.97 0 top
FID46  FIDUCIAL1X2  [FIDUCIAL-1X2]  218.69,120.4 0 top
FID47  FIDUCIAL1X2  [FIDUCIAL-1X2]  225.93,100.97 0 top
FID48  FIDUCIAL1X2  [FIDUCIAL-1X2]  236.98,120.4 0 top
FID49  FIDUCIAL1X2  [FIDUCIAL-1X2]  11.05,178.69 0 top
FID50  FIDUCIAL1X2  [FIDUCIAL-1X2]  22.1,198.12 0 top
FID51  FIDUCIAL1X2  [FIDUCIAL-1X2]  29.34,178.69 0 top
FID52  FIDUCIAL1X2  [FIDUCIAL-1X2]  40.39,198.12 0 top
FID53  FIDUCIAL1X2  [FIDUCIAL-1X2]  47.62,178.69 0 top
FID54  FIDUCIAL1X2  [FIDUCIAL-1X2]  58.67,198.12 0 top
FID55  FIDUCIAL1X2  [FIDUCIAL-1X2]  65.91,178.69 0 top
FID56  FIDUCIAL1X2  [FIDUCIAL-1X2]  76.96,198.12 0 top
FID57  FIDUCIAL1X2  [FIDUCIAL-1X2]  84.2,178.69 0 top
FID58  FIDUCIAL1X2  [FIDUCIAL-1X2]  95.25,198.12 0 top
FID59  FIDUCIAL1X2  [FIDUCIAL-1X2]  102.49,178.69 0 top
FID60  FIDUCIAL1X2  [FIDUCIAL-1X2]  113.54,198.12 0 top
FID61  FIDUCIAL1X2  [FIDUCIAL-1X2]  11.05,242.7 0 top
FID62  FIDUCIAL1X2  [FIDUCIAL-1X2]  22.1,262.13 0 top
FID63  FIDUCIAL1X2  [FIDUCIAL-1X2]  29.34,242.7 0 top
FID64  FIDUCIAL1X2  [FIDUCIAL-1X2]  40.39,262.13 0 top
FID65  FIDUCIAL1X2  [FIDUCIAL-1X2]  47.62,242.7 0 top
FID66  FIDUCIAL1X2  [FIDUCIAL-1X2]  58.67,262.13 0 top
FID67  FIDUCIAL1X2  [FIDUCIAL-1X2]  65.91,242.7 0 top
FID68  FIDUCIAL1X2  [FIDUCIAL-1X2]  76.96,262.13 0 top
FID69  FIDUCIAL1X2  [FIDUCIAL-1X2]  84.2,242.7 0 top
FID70  FIDUCIAL1X2  [FIDUCIAL-1X2]  95.25,262.13 0 top
FID71  FIDUCIAL1X2  [FIDUCIAL-1X2]  102.49,242.7 0 top
FID72  FIDUCIAL1X2  [FIDUCIAL-1X2]  113.54,262.13 0 top
FID73  FIDUCIAL1X2  [FIDUCIAL-1X2]  134.49,178.69 0 top
FID74  FIDUCIAL1X2  [FIDUCIAL-1X2]  145.54,198.12 0 top
FID75  FIDUCIAL1X2  [FIDUCIAL-1X2]  152.78,178.69 0 top
FID76  FIDUCIAL1X2  [FIDUCIAL-1X2]  163.83,198.12 0 top
FID77  FIDUCIAL1X2  [FIDUCIAL-1X2]  171.07,178.69 0 top
FID78  FIDUCIAL1X2  [FIDUCIAL-1X2]  182.12,198.12 0 top
FID79  FIDUCIAL1X2  [FIDUCIAL-1X2]  189.36,178.69 0 top
FID80  FIDUCIAL1X2  [FIDUCIAL-1X2]  200.41,198.12 0 top
FID81  FIDUCIAL1X2  [FIDUCIAL-1X2]  207.65,178.69 0 top
FID82  FIDUCIAL1X2  [FIDUCIAL-1X2]  218.69,198.12 0 top
FID83  FIDUCIAL1X2  [FIDUCIAL-1X2]  225.93,178.69 0 top
FID84  FIDUCIAL1X2  [FIDUCIAL-1X2]  236.98,198.12 0 top
FID85  FIDUCIAL1X2  [FIDUCIAL-1X2]  134.49,242.7 0 top
FID86  FIDUCIAL1X2  [FIDUCIAL-1X2]  145.54,262.13 0 top
FID87  FIDUCIAL1X2  [FIDUCIAL-1X2]  152.78,242.7 0 top
FID88  FIDUCIAL1X2  [FIDUCIAL-1X2]  163.83,262.13 0 top
FID89  FIDUCIAL1X2  [FIDUCIAL-1X2]  171.07,242.7 0 top
FID90  FIDUCIAL1X2  [FIDUCIAL-1X2]  182.12,262.13 0 top
FID91  FIDUCIAL1X2  [FIDUCIAL-1X2]  189.36,242.7 0 top
FID92  FIDUCIAL1X2  [FIDUCIAL-1X2]  200.41,262.13 0 top
FID93  FIDUCIAL1X2  [FIDUCIAL-1X2]  207.65,242.7 0 top
FID94  FIDUCIAL1X2  [FIDUCIAL-1X2]  218.69,262.13 0 top
FID95  FIDUCIAL1X2  [FIDUCIAL-1X2]  225.93,242.7 0 top
FID96  FIDUCIAL1X2  [FIDUCIAL-1X2]  236.98,262.13 0 top
JP1  USBPCB  [USB-A-PCB]  15.75,65.28 270 top
JP2  USBPCB  [USB-A-PCB]  34.04,65.28 270 top
JP3  M15LOCK_NO_SILK  [1X15_LOCK_NO_SILK]  8.13,13.21 90 top
JP4  M15LOCK_NO_SILK  [1X15_LOCK_NO_SILK]  23.37,48.77 270 top
JP5  M021X02_NO_SILK  [1X02_NO_SILK]  20.19,17.78 90 top
JP6  M03LOCK Female  [1X03_LOCK_NO_SILK]  13.21,8.13 0 top
JP7  M021X02_NO_SILK  [1X02_NO_SILK]  38.48,17.78 90 top
JP8  M03LOCK Female  [1X03_LOCK_NO_SILK]  31.5,8.13 0 top
JP9  M15LOCK_NO_SILK  [1X15_LOCK_NO_SILK]  41.66,48.77 270 top
JP10  M15LOCK_NO_SILK  [1X15_LOCK_NO_SILK]  26.42,13.21 90 top
JP11  USBPCB  [USB-A-PCB]  52.32,65.28 270 top
JP12  M021X02_NO_SILK  [1X02_NO_SILK]  56.77,17.78 90 top
JP13  M03LOCK Female  [1X03_LOCK_NO_SILK]  49.78,8.13 0 top
JP14  M15LOCK_NO_SILK  [1X15_LOCK_NO_SILK]  59.94,48.77 270 top
JP15  M15LOCK_NO_SILK  [1X15_LOCK_NO_SILK]  44.7,13.21 90 top
JP16  USBPCB  [USB-A-PCB]  70.61,65.28 270 top
JP17  M021X02_NO_SILK  [1X02_NO_SILK]  75.06,17.78 90 top
JP18  M03LOCK Female  [1X03_LOCK_NO_SILK]  68.07,8.13 0 top
JP19  M15LOCK_NO_SILK  [1X15_LOCK_NO_SILK]  78.23,48.77 270 top
JP20  M15LOCK_NO_SILK  [1X15_LOCK_NO_SILK]  62.99,13.21 90 top
JP21  USBPCB  [USB-A-PCB]  88.9,65.28 270 top
JP22  M021X02_NO_SILK  [1X02_NO_SILK]  93.34,17.78 90 top
JP23  M03LOCK Female  [1X03_LOCK_NO_SILK]  86.36,8.13 0 top
JP24  M15LOCK_NO_SILK  [1X15_LOCK_NO_SILK]  96.52,48.77 270 top
JP25  M15LOCK_NO_SILK  [1X15_LOCK_NO_SILK]  81.28,13.21 90 top
JP26  USBPCB  [USB-A-PCB]  107.19,65.28 270 top
JP27  M021X02_NO_SILK  [1X02_NO_SILK]  111.63,17.78 90 top
JP28  M03LOCK Female  [1X03_LOCK_NO_SILK]  104.65,8.13 0 top
JP29  M15LOCK_NO_SILK  [1X15_LOCK_NO_SILK]  114.81,48.77 270 top
JP30  M15LOCK_NO_SILK  [1X15_LOCK_NO_SILK]  99.57,13.21 90 top
JP31  USBPCB  [USB-A-PCB]  15.75,129.29 270 top
JP32  M021X02_NO_SILK  [1X02_NO_SILK]  20.19,81.79 90 top
JP33  M03LOCK Female  [1X03_LOCK_NO_SILK]  13.21,72.14 0 top
JP34  M15LOCK_NO_SILK  [1X15_LOCK_NO_SILK]  23.37,112.78 270 top
JP35  M15LOCK_NO_SILK  [1X15_LOCK_NO_SILK]  8.13,77.22 90 top
JP36  USBPCB  [USB-A-PCB]  34.04,129.29 270 top
JP37  M021X02_NO_SILK  [1X02_NO_SILK]  38.48,81.79 90 top
JP38  M03LOCK Female  [1X03_LOCK_NO_SILK]  31.5,72.14 0 top
JP39  M15LOCK_NO_SILK  [1X15_LOCK_NO_SILK]  41.66,112.78 270 top
JP40  M15LOCK_NO_SILK  [1X15_LOCK_NO_SILK]  26.42,77.22 90 top
JP41  USBPCB  [USB-A-PCB]  52.32,129.29 270 top
JP42  M021X02_NO_SILK  [1X02_NO_SILK]  56.77,81.79 90 top
JP43  M03LOCK Female  [1X03_LOCK_NO_SILK]  49.78,72.14 0 top
JP44  M15LOCK_NO_SILK  [1X15_LOCK_NO_SILK]  59.94,112.78 270 top
JP45  M15LOCK_NO_SILK  [1X15_LOCK_NO_SILK]  44.7,77.22 90 top
JP46  USBPCB  [USB-A-PCB]  70.61,129.29 270 top
JP47  M021X02_NO_SILK  [1X02_NO_SILK]  75.06,81.79 90 top
JP48  M03LOCK Female  [1X03_LOCK_NO_SILK]  68.07,72.14 0 top
JP49  M15LOCK_NO_SILK  [1X15_LOCK_NO_SILK]  78.23,112.78 270 top
JP50  M15LOCK_NO_SILK  [1X15_LOCK_NO_SILK]  62.99,77.22 90 top
JP51  USBPCB  [USB-A-PCB]  88.9,129.29 270 top
JP52  M021X02_NO_SILK  [1X02_NO_SILK]  93.34,81.79 90 top
JP53  M03LOCK Female  [1X03_LOCK_NO_SILK]  86.36,72.14 0 top
JP54  M15LOCK_NO_SILK  [1X15_LOCK_NO_SILK]  96.52,112.78 270 top
JP55  M15LOCK_NO_SILK  [1X15_LOCK_NO_SILK]  81.28,77.22 90 top
JP56  USBPCB  [USB-A-PCB]  107.19,129.29 270 top
JP57  M021X02_NO_SILK  [1X02_NO_SILK]  111.63,81.79 90 top
JP58  M03LOCK Female  [1X03_LOCK_NO_SILK]  104.65,72.14 0 top
JP59  M15LOCK_NO_SILK  [1X15_LOCK_NO_SILK]  114.81,112.78 270 top
JP60  M15LOCK_NO_SILK  [1X15_LOCK_NO_SILK]  99.57,77.22 90 top
JP61  USBPCB  [USB-A-PCB]  139.19,65.28 270 top
JP62  M021X02_NO_SILK  [1X02_NO_SILK]  143.64,17.78 90 top
JP63  M03LOCK Female  [1X03_LOCK_NO_SILK]  136.65,8.13 0 top
JP64  M15LOCK_NO_SILK  [1X15_LOCK_NO_SILK]  146.81,48.77 270 top
JP65  M15LOCK_NO_SILK  [1X15_LOCK_NO_SILK]  131.57,13.21 90 top
JP66  USBPCB  [USB-A-PCB]  157.48,65.28 270 top
JP67  M021X02_NO_SILK  [1X02_NO_SILK]  161.93,17.78 90 top
JP68  M03LOCK Female  [1X03_LOCK_NO_SILK]  154.94,8.13 0 top
JP69  M15LOCK_NO_SILK  [1X15_LOCK_NO_SILK]  165.1,48.77 270 top
JP70  M15LOCK_NO_SILK  [1X15_LOCK_NO_SILK]  149.86,13.21 90 top
JP71  USBPCB  [USB-A-PCB]  175.77,65.28 270 top
JP72  M021X02_NO_SILK  [1X02_NO_SILK]  180.21,17.78 90 top
JP73  M03LOCK Female  [1X03_LOCK_NO_SILK]  173.23,8.13 0 top
JP74  M15LOCK_NO_SILK  [1X15_LOCK_NO_SILK]  183.39,48.77 270 top
JP75  M15LOCK_NO_SILK  [1X15_LOCK_NO_SILK]  168.15,13.21 90 top
JP76  USBPCB  [USB-A-PCB]  194.06,65.28 270 top
JP77  M021X02_NO_SILK  [1X02_NO_SILK]  198.5,17.78 90 top
JP78  M03LOCK Female  [1X03_LOCK_NO_SILK]  191.52,8.13 0 top
JP79  M15LOCK_NO_SILK  [1X15_LOCK_NO_SILK]  201.68,48.77 270 top
JP80  M15LOCK_NO_SILK  [1X15_LOCK_NO_SILK]  186.44,13.21 90 top
JP81  USBPCB  [USB-A-PCB]  212.34,65.28 270 top
JP82  M021X02_NO_SILK  [1X02_NO_SILK]  216.79,17.78 90 top
JP83  M03LOCK Female  [1X03_LOCK_NO_SILK]  209.8,8.13 0 top
JP84  M15LOCK_NO_SILK  [1X15_LOCK_NO_SILK]  219.96,48.77 270 top
JP85  M15LOCK_NO_SILK  [1X15_LOCK_NO_SILK]  204.72,13.21 90 top
JP86  USBPCB  [USB-A-PCB]  230.63,65.28 270 top
JP87  M021X02_NO_SILK  [1X02_NO_SILK]  235.08,17.78 90 top
JP88  M03LOCK Female  [1X03_LOCK_NO_SILK]  228.09,8.13 0 top
JP89  M15LOCK_NO_SILK  [1X15_LOCK_NO_SILK]  238.25,48.77 270 top
JP90  M15LOCK_NO_SILK  [1X15_LOCK_NO_SILK]  223.01,13.21 90 top
JP91  USBPCB  [USB-A-PCB]  139.19,129.29 270 top
JP92  M021X02_NO_SILK  [1X02_NO_SILK]  143.64,81.79 90 top
JP93  M03LOCK Female  [1X03_LOCK_NO_SILK]  136.65,72.14 0 top
JP94  M15LOCK_NO_SILK  [1X15_LOCK_NO_SILK]  146.81,112.78 270 top
JP95  M15LOCK_NO_SILK  [1X15_LOCK_NO_SILK]  131.57,77.22 90 top
JP96  USBPCB  [USB-A-PCB]  157.48,129.29 270 top
JP97  M021X02_NO_SILK  [1X02_NO_SILK]  161.93,81.79 90 top
JP98  M03LOCK Female  [1X03_LOCK_NO_SILK]  154.94,72.14 0 top
JP99  M15LOCK_NO_SILK  [1X15_LOCK_NO_SILK]  165.1,112.78 270 top
JP100  M15LOCK_NO_SILK  [1X15_LOCK_NO_SILK]  149.86,77.22 90 top
JP101  USBPCB  [USB-A-PCB]  175.77,129.29 270 top
JP102  M021X02_NO_SILK  [1X02_NO_SILK]  180.21,81.79 90 top
JP103  M03LOCK Female  [1X03_LOCK_NO_SILK]  173.23,72.14 0 top
JP104  M15LOCK_NO_SILK  [1X15_LOCK_NO_SILK]  183.39,112.78 270 top
JP105  M15LOCK_NO_SILK  [1X15_LOCK_NO_SILK]  168.15,77.22 90 top
JP106  USBPCB  [USB-A-PCB]  194.06,129.29 270 top
JP107  M021X02_NO_SILK  [1X02_NO_SILK]  198.5,81.79 90 top
JP108  M03LOCK Female  [1X03_LOCK_NO_SILK]  191.52,72.14 0 top
JP109  M15LOCK_NO_SILK  [1X15_LOCK_NO_SILK]  201.68,112.78 270 top
JP110  M15LOCK_NO_SILK  [1X15_LOCK_NO_SILK]  186.44,77.22 90 top
JP111  USBPCB  [USB-A-PCB]  212.34,129.29 270 top
JP112  M021X02_NO_SILK  [1X02_NO_SILK]  216.79,81.79 90 top
JP113  M03LOCK Female  [1X03_LOCK_NO_SILK]  209.8,72.14 0 top
JP114  M15LOCK_NO_SILK  [1X15_LOCK_NO_SILK]  219.96,112.78 270 top
JP115  M15LOCK_NO_SILK  [1X15_LOCK_NO_SILK]  204.72,77.22 90 top
JP116  USBPCB  [USB-A-PCB]  230.63,129.29 270 top
JP117  M021X02_NO_SILK  [1X02_NO_SILK]  235.08,81.79 90 top
JP118  M03LOCK Female  [1X03_LOCK_NO_SILK]  228.09,72.14 0 top
JP119  M15LOCK_NO_SILK  [1X15_LOCK_NO_SILK]  238.25,112.78 270 top
JP120  M15LOCK_NO_SILK  [1X15_LOCK_NO_SILK]  223.01,77.22 90 top
JP121  USBPCB  [USB-A-PCB]  15.75,207.01 270 top
JP122  M021X02_NO_SILK  [1X02_NO_SILK]  20.19,159.51 90 top
JP123  M03LOCK Female  [1X03_LOCK_NO_SILK]  13.21,149.86 0 top
JP124  M15LOCK_NO_SILK  [1X15_LOCK_NO_SILK]  23.37,190.5 270 top
JP125  M15LOCK_NO_SILK  [1X15_LOCK_NO_SILK]  8.13,154.94 90 top
JP126  USBPCB  [USB-A-PCB]  34.04,207.01 270 top
JP127  M021X02_NO_SILK  [1X02_NO_SILK]  38.48,159.51 90 top
JP128  M03LOCK Female  [1X03_LOCK_NO_SILK]  31.5,149.86 0 top
JP129  M15LOCK_NO_SILK  [1X15_LOCK_NO_SILK]  41.66,190.5 270 top
JP130  M15LOCK_NO_SILK  [1X15_LOCK_NO_SILK]  26.42,154.94 90 top
JP131  USBPCB  [USB-A-PCB]  52.32,207.01 270 top
JP132  M021X02_NO_SILK  [1X02_NO_SILK]  56.77,159.51 90 top
JP133  M03LOCK Female  [1X03_LOCK_NO_SILK]  49.78,149.86 0 top
JP134  M15LOCK_NO_SILK  [1X15_LOCK_NO_SILK]  59.94,190.5 270 top
JP135  M15LOCK_NO_SILK  [1X15_LOCK_NO_SILK]  44.7,154.94 90 top
JP136  USBPCB  [USB-A-PCB]  70.61,207.01 270 top
JP137  M021X02_NO_SILK  [1X02_NO_SILK]  75.06,159.51 90 top
JP138  M03LOCK Female  [1X03_LOCK_NO_SILK]  68.07,149.86 0 top
JP139  M15LOCK_NO_SILK  [1X15_LOCK_NO_SILK]  78.23,190.5 270 top
JP140  M15LOCK_NO_SILK  [1X15_LOCK_NO_SILK]  62.99,154.94 90 top
JP141  USBPCB  [USB-A-PCB]  88.9,207.01 270 top
JP142  M021X02_NO_SILK  [1X02_NO_SILK]  93.34,159.51 90 top
JP143  M03LOCK Female  [1X03_LOCK_NO_SILK]  86.36,149.86 0 top
JP144  M15LOCK_NO_SILK  [1X15_LOCK_NO_SILK]  96.52,190.5 270 top
JP145  M15LOCK_NO_SILK  [1X15_LOCK_NO_SILK]  81.28,154.94 90 top
JP146  USBPCB  [USB-A-PCB]  107.19,207.01 270 top
JP147  M021X02_NO_SILK  [1X02_NO_SILK]  111.63,159.51 90 top
JP148  M03LOCK Female  [1X03_LOCK_NO_SILK]  104.65,149.86 0 top
JP149  M15LOCK_NO_SILK  [1X15_LOCK_NO_SILK]  114.81,190.5 270 top
JP150  M15LOCK_NO_SILK  [1X15_LOCK_NO_SILK]  99.57,154.94 90 top
JP151  USBPCB  [USB-A-PCB]  15.75,271.02 270 top
JP152  M021X02_NO_SILK  [1X02_NO_SILK]  20.19,223.52 90 top
JP153  M03LOCK Female  [1X03_LOCK_NO_SILK]  13.21,213.87 0 top
JP154  M15LOCK_NO_SILK  [1X15_LOCK_NO_SILK]  23.37,254.51 270 top
JP155  M15LOCK_NO_SILK  [1X15_LOCK_NO_SILK]  8.13,218.95 90 top
JP156  USBPCB  [USB-A-PCB]  34.04,271.02 270 top
JP157  M021X02_NO_SILK  [1X02_NO_SILK]  38.48,223.52 90 top
JP158  M03LOCK Female  [1X03_LOCK_NO_SILK]  31.5,213.87 0 top
JP159  M15LOCK_NO_SILK  [1X15_LOCK_NO_SILK]  41.66,254.51 270 top
JP160  M15LOCK_NO_SILK  [1X15_LOCK_NO_SILK]  26.42,218.95 90 top
JP161  USBPCB  [USB-A-PCB]  52.32,271.02 270 top
JP162  M021X02_NO_SILK  [1X02_NO_SILK]  56.77,223.52 90 top
JP163  M03LOCK Female  [1X03_LOCK_NO_SILK]  49.78,213.87 0 top
JP164  M15LOCK_NO_SILK  [1X15_LOCK_NO_SILK]  59.94,254.51 270 top
JP165  M15LOCK_NO_SILK  [1X15_LOCK_NO_SILK]  44.7,218.95 90 top
JP166  USBPCB  [USB-A-PCB]  70.61,271.02 270 top
JP167  M021X02_NO_SILK  [1X02_NO_SILK]  75.06,223.52 90 top
JP168  M03LOCK Female  [1X03_LOCK_NO_SILK]  68.07,213.87 0 top
JP169  M15LOCK_NO_SILK  [1X15_LOCK_NO_SILK]  78.23,254.51 270 top
JP170  M15LOCK_NO_SILK  [1X15_LOCK_NO_SILK]  62.99,218.95 90 top
JP171  USBPCB  [USB-A-PCB]  88.9,271.02 270 top
JP172  M021X02_NO_SILK  [1X02_NO_SILK]  93.34,223.52 90 top
JP173  M03LOCK Female  [1X03_LOCK_NO_SILK]  86.36,213.87 0 top
JP174  M15LOCK_NO_SILK  [1X15_LOCK_NO_SILK]  96.52,254.51 270 top
JP175  M15LOCK_NO_SILK  [1X15_LOCK_NO_SILK]  81.28,218.95 90 top
JP176  USBPCB  [USB-A-PCB]  107.19,271.02 270 top
JP177  M021X02_NO_SILK  [1X02_NO_SILK]  111.63,223.52 90 top
JP178  M03LOCK Female  [1X03_LOCK_NO_SILK]  104.65,213.87 0 top
JP179  M15LOCK_NO_SILK  [1X15_LOCK_NO_SILK]  114.81,254.51 270 top
JP180  M15LOCK_NO_SILK  [1X15_LOCK_NO_SILK]  99.57,218.95 90 top
JP181  USBPCB  [USB-A-PCB]  139.19,207.01 270 top
JP182  M021X02_NO_SILK  [1X02_NO_SILK]  143.64,159.51 90 top
JP183  M03LOCK Female  [1X03_LOCK_NO_SILK]  136.65,149.86 0 top
JP184  M15LOCK_NO_SILK  [1X15_LOCK_NO_SILK]  146.81,190.5 270 top
JP185  M15LOCK_NO_SILK  [1X15_LOCK_NO_SILK]  131.57,154.94 90 top
JP186  USBPCB  [USB-A-PCB]  157.48,207.01 270 top
JP187  M021X02_NO_SILK  [1X02_NO_SILK]  161.93,159.51 90 top
JP188  M03LOCK Female  [1X03_LOCK_NO_SILK]  154.94,149.86 0 top
JP189  M15LOCK_NO_SILK  [1X15_LOCK_NO_SILK]  165.1,190.5 270 top
JP190  M15LOCK_NO_SILK  [1X15_LOCK_NO_SILK]  149.86,154.94 90 top
JP191  USBPCB  [USB-A-PCB]  175.77,207.01 270 top
JP192  M021X02_NO_SILK  [1X02_NO_SILK]  180.21,159.51 90 top
JP193  M03LOCK Female  [1X03_LOCK_NO_SILK]  173.23,149.86 0 top
JP194  M15LOCK_NO_SILK  [1X15_LOCK_NO_SILK]  183.39,190.5 270 top
JP195  M15LOCK_NO_SILK  [1X15_LOCK_NO_SILK]  168.15,154.94 90 top
JP196  USBPCB  [USB-A-PCB]  194.06,207.01 270 top
JP197  M021X02_NO_SILK  [1X02_NO_SILK]  198.5,159.51 90 top
JP198  M03LOCK Female  [1X03_LOCK_NO_SILK]  191.52,149.86 0 top
JP199  M15LOCK_NO_SILK  [1X15_LOCK_NO_SILK]  201.68,190.5 270 top
JP200  M15LOCK_NO_SILK  [1X15_LOCK_NO_SILK]  186.44,154.94 90 top
JP201  USBPCB  [USB-A-PCB]  212.34,207.01 270 top
JP202  M021X02_NO_SILK  [1X02_NO_SILK]  216.79,159.51 90 top
JP203  M03LOCK Female  [1X03_LOCK_NO_SILK]  209.8,149.86 0 top
JP204  M15LOCK_NO_SILK  [1X15_LOCK_NO_SILK]  219.96,190.5 270 top
JP205  M15LOCK_NO_SILK  [1X15_LOCK_NO_SILK]  204.72,154.94 90 top
JP206  USBPCB  [USB-A-PCB]  230.63,207.01 270 top
JP207  M021X02_NO_SILK  [1X02_NO_SILK]  235.08,159.51 90 top
JP208  M03LOCK Female  [1X03_LOCK_NO_SILK]  228.09,149.86 0 top
JP209  M15LOCK_NO_SILK  [1X15_LOCK_NO_SILK]  238.25,190.5 270 top
JP210  M15LOCK_NO_SILK  [1X15_LOCK_NO_SILK]  223.01,154.94 90 top
JP211  USBPCB  [USB-A-PCB]  139.19,271.02 270 top
JP212  M021X02_NO_SILK  [1X02_NO_SILK]  143.64,223.52 90 top
JP213  M03LOCK Female  [1X03_LOCK_NO_SILK]  136.65,213.87 0 top
JP214  M15LOCK_NO_SILK  [1X15_LOCK_NO_SILK]  146.81,254.51 270 top
JP215  M15LOCK_NO_SILK  [1X15_LOCK_NO_SILK]  131.57,218.95 90 top
JP216  USBPCB  [USB-A-PCB]  157.48,271.02 270 top
JP217  M021X02_NO_SILK  [1X02_NO_SILK]  161.93,223.52 90 top
JP218  M03LOCK Female  [1X03_LOCK_NO_SILK]  154.94,213.87 0 top
JP219  M15LOCK_NO_SILK  [1X15_LOCK_NO_SILK]  165.1,254.51 270 top
JP220  M15LOCK_NO_SILK  [1X15_LOCK_NO_SILK]  149.86,218.95 90 top
JP221  USBPCB  [USB-A-PCB]  175.77,271.02 270 top
JP222  M021X02_NO_SILK  [1X02_NO_SILK]  180.21,223.52 90 top
JP223  M03LOCK Female  [1X03_LOCK_NO_SILK]  173.23,213.87 0 top
JP224  M15LOCK_NO_SILK  [1X15_LOCK_NO_SILK]  183.39,254.51 270 top
JP225  M15LOCK_NO_SILK  [1X15_LOCK_NO_SILK]  168.15,218.95 90 top
JP226  USBPCB  [USB-A-PCB]  194.06,271.02 270 top
JP227  M021X02_NO_SILK  [1X02_NO_SILK]  198.5,223.52 90 top
JP228  M03LOCK Female  [1X03_LOCK_NO_SILK]  191.52,213.87 0 top
JP229  M15LOCK_NO_SILK  [1X15_LOCK_NO_SILK]  201.68,254.51 270 top
JP230  M15LOCK_NO_SILK  [1X15_LOCK_NO_SILK]  186.44,218.95 90 top
JP231  USBPCB  [USB-A-PCB]  212.34,271.02 270 top
JP232  M021X02_NO_SILK  [1X02_NO_SILK]  216.79,223.52 90 top
JP233  M03LOCK Female  [1X03_LOCK_NO_SILK]  209.8,213.87 0 top
JP234  M15LOCK_NO_SILK  [1X15_LOCK_NO_SILK]  219.96,254.51 270 top
JP235  M15LOCK_NO_SILK  [1X15_LOCK_NO_SILK]  204.72,218.95 90 top
JP236  USBPCB  [USB-A-PCB]  230.63,271.02 270 top
JP237  M021X02_NO_SILK  [1X02_NO_SILK]  235.08,223.52 90 top
JP238  M03LOCK Female  [1X03_LOCK_NO_SILK]  228.09,213.87 0 top
JP239  M15LOCK_NO_SILK  [1X15_LOCK_NO_SILK]  238.25,254.51 270 top
JP240  M15LOCK_NO_SILK  [1X15_LOCK_NO_SILK]  223.01,218.95 90 top
LOGO1  SFE_LOGO_FLAME.1_INCH  [SFE_LOGO_FLAME_.1]  18.69,57.28 0 top
LOGO2  OSHW-LOGOS  [OSHW-LOGO-S]  12.22,58.8 0 top
LOGO3  SFE_LOGO_FLAME.1_INCH  [SFE_LOGO_FLAME_.1]  36.98,57.28 0 top
LOGO4  OSHW-LOGOS  [OSHW-LOGO-S]  30.51,58.8 0 top
LOGO5  SFE_LOGO_FLAME.1_INCH  [SFE_LOGO_FLAME_.1]  55.27,57.28 0 top
LOGO6  OSHW-LOGOS  [OSHW-LOGO-S]  48.79,58.8 0 top
LOGO7  SFE_LOGO_FLAME.1_INCH  [SFE_LOGO_FLAME_.1]  73.56,57.28 0 top
LOGO8  OSHW-LOGOS  [OSHW-LOGO-S]  67.08,58.8 0 top
LOGO9  SFE_LOGO_FLAME.1_INCH  [SFE_LOGO_FLAME_.1]  91.85,57.28 0 top
LOGO10  OSHW-LOGOS  [OSHW-LOGO-S]  85.37,58.8 0 top
LOGO11  SFE_LOGO_FLAME.1_INCH  [SFE_LOGO_FLAME_.1]  110.13,57.28 0 top
LOGO12  OSHW-LOGOS  [OSHW-LOGO-S]  103.66,58.8 0 top
LOGO13  SFE_LOGO_FLAME.1_INCH  [SFE_LOGO_FLAME_.1]  18.69,121.28 0 top
LOGO14  OSHW-LOGOS  [OSHW-LOGO-S]  12.22,122.81 0 top
LOGO15  SFE_LOGO_FLAME.1_INCH  [SFE_LOGO_FLAME_.1]  36.98,121.28 0 top
LOGO16  OSHW-LOGOS  [OSHW-LOGO-S]  30.51,122.81 0 top
LOGO17  SFE_LOGO_FLAME.1_INCH  [SFE_LOGO_FLAME_.1]  55.27,121.28 0 top
LOGO18  OSHW-LOGOS  [OSHW-LOGO-S]  48.79,122.81 0 top
LOGO19  SFE_LOGO_FLAME.1_INCH  [SFE_LOGO_FLAME_.1]  73.56,121.28 0 top
LOGO20  OSHW-LOGOS  [OSHW-LOGO-S]  67.08,122.81 0 top
LOGO21  SFE_LOGO_FLAME.1_INCH  [SFE_LOGO_FLAME_.1]  91.85,121.28 0 top
LOGO22  OSHW-LOGOS  [OSHW-LOGO-S]  85.37,122.81 0 top
LOGO23  SFE_LOGO_FLAME.1_INCH  [SFE_LOGO_FLAME_.1]  110.13,121.28 0 top
LOGO24  OSHW-LOGOS  [OSHW-LOGO-S]  103.66,122.81 0 top
LOGO25  SFE_LOGO_FLAME.1_INCH  [SFE_LOGO_FLAME_.1]  142.14,57.28 0 top
LOGO26  OSHW-LOGOS  [OSHW-LOGO-S]  135.66,58.8 0 top
LOGO27  SFE_LOGO_FLAME.1_INCH  [SFE_LOGO_FLAME_.1]  160.43,57.28 0 top
LOGO28  OSHW-LOGOS  [OSHW-LOGO-S]  153.95,58.8 0 top
LOGO29  SFE_LOGO_FLAME.1_INCH  [SFE_LOGO_FLAME_.1]  178.71,57.28 0 top
LOGO30  OSHW-LOGOS  [OSHW-LOGO-S]  172.24,58.8 0 top
LOGO31  SFE_LOGO_FLAME.1_INCH  [SFE_LOGO_FLAME_.1]  197,57.28 0 top
LOGO32  OSHW-LOGOS  [OSHW-LOGO-S]  190.53,58.8 0 top
LOGO33  SFE_LOGO_FLAME.1_INCH  [SFE_LOGO_FLAME_.1]  215.29,57.28 0 top
LOGO34  OSHW-LOGOS  [OSHW-LOGO-S]  208.81,58.8 0 top
LOGO35  SFE_LOGO_FLAME.1_INCH  [SFE_LOGO_FLAME_.1]  233.58,57.28 0 top
LOGO36  OSHW-LOGOS  [OSHW-LOGO-S]  227.1,58.8 0 top
LOGO37  SFE_LOGO_FLAME.1_INCH  [SFE_LOGO_FLAME_.1]  142.14,121.28 0 top
LOGO38  OSHW-LOGOS  [OSHW-LOGO-S]  135.66,122.81 0 top
LOGO39  SFE_LOGO_FLAME.1_INCH  [SFE_LOGO_FLAME_.1]  160.43,121.28 0 top
LOGO40  OSHW-LOGOS  [OSHW-LOGO-S]  153.95,122.81 0 top
LOGO41  SFE_LOGO_FLAME.1_INCH  [SFE_LOGO_FLAME_.1]  178.71,121.28 0 top
LOGO42  OSHW-LOGOS  [OSHW-LOGO-S]  172.24,122.81 0 top
LOGO43  SFE_LOGO_FLAME.1_INCH  [SFE_LOGO_FLAME_.1]  197,121.28 0 top
LOGO44  OSHW-LOGOS  [OSHW-LOGO-S]  190.53,122.81 0 top
LOGO45  SFE_LOGO_FLAME.1_INCH  [SFE_LOGO_FLAME_.1]  215.29,121.28 0 top
LOGO46  OSHW-LOGOS  [OSHW-LOGO-S]  208.81,122.81 0 top
LOGO47  SFE_LOGO_FLAME.1_INCH  [SFE_LOGO_FLAME_.1]  233.58,121.28 0 top